# Altium PCB TermoCoupleNode.PcbDoc (part 1 of 2)
Units mm, origin at the board's own origin, x right, y up, seen from the top; angles counter-clockwise.
Board outline 65 x 65 mm, 4 copper layers (Top Layer 1, GND, 3V3, Bottom Layer 1), stack 0.408 mm thick; 64 components, 46 nets, 247 pads, 276 vias.
Unrouted connection lines stored in the file: 64.
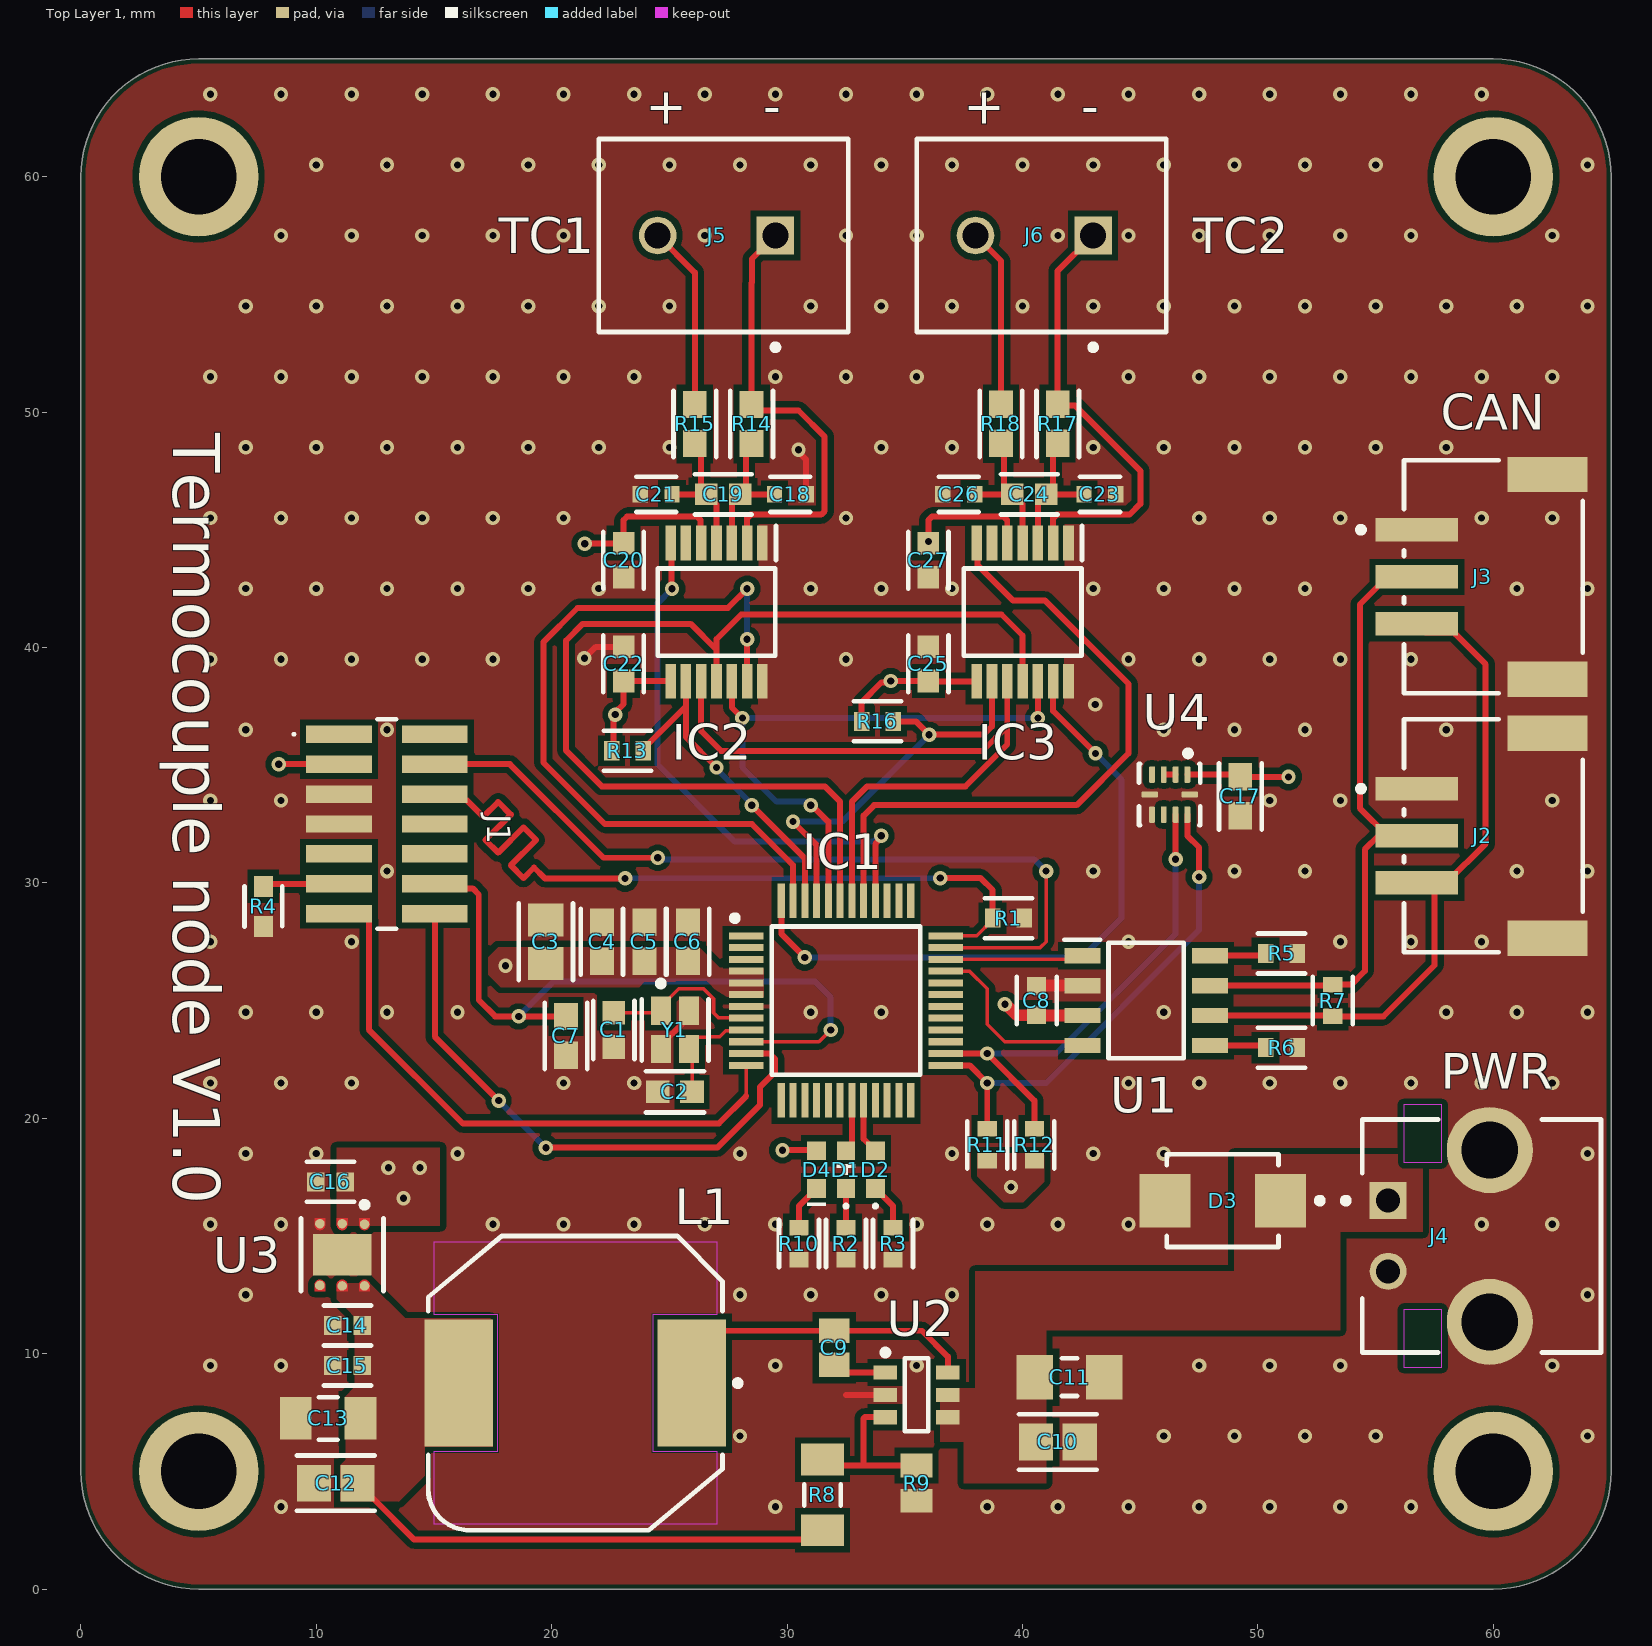
[diagram p0: Top Layer 1 view]
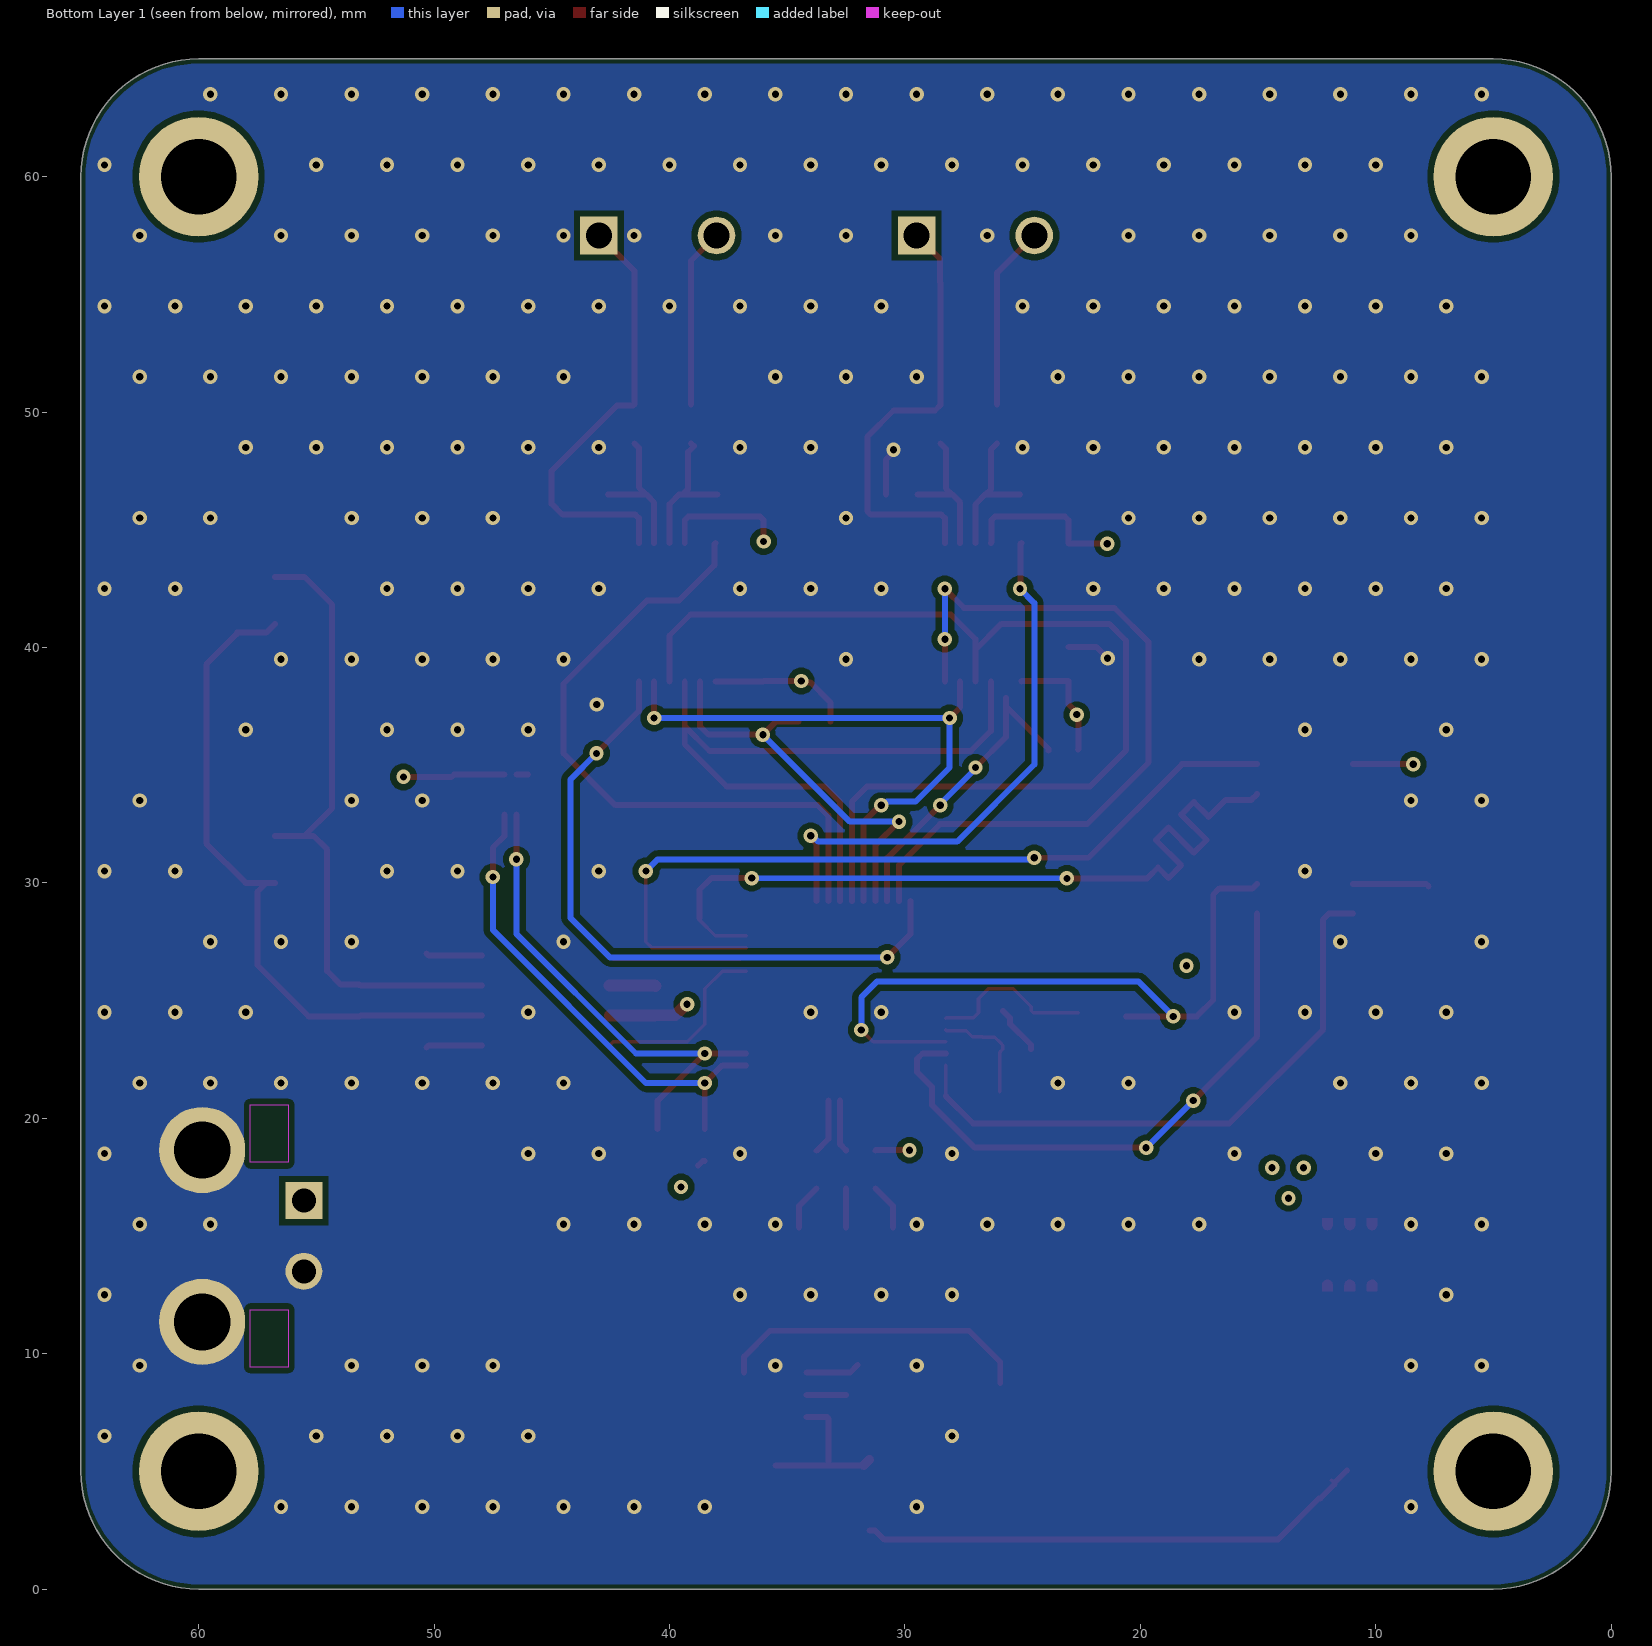
[diagram p1: Bottom Layer 1 view, seen from below]
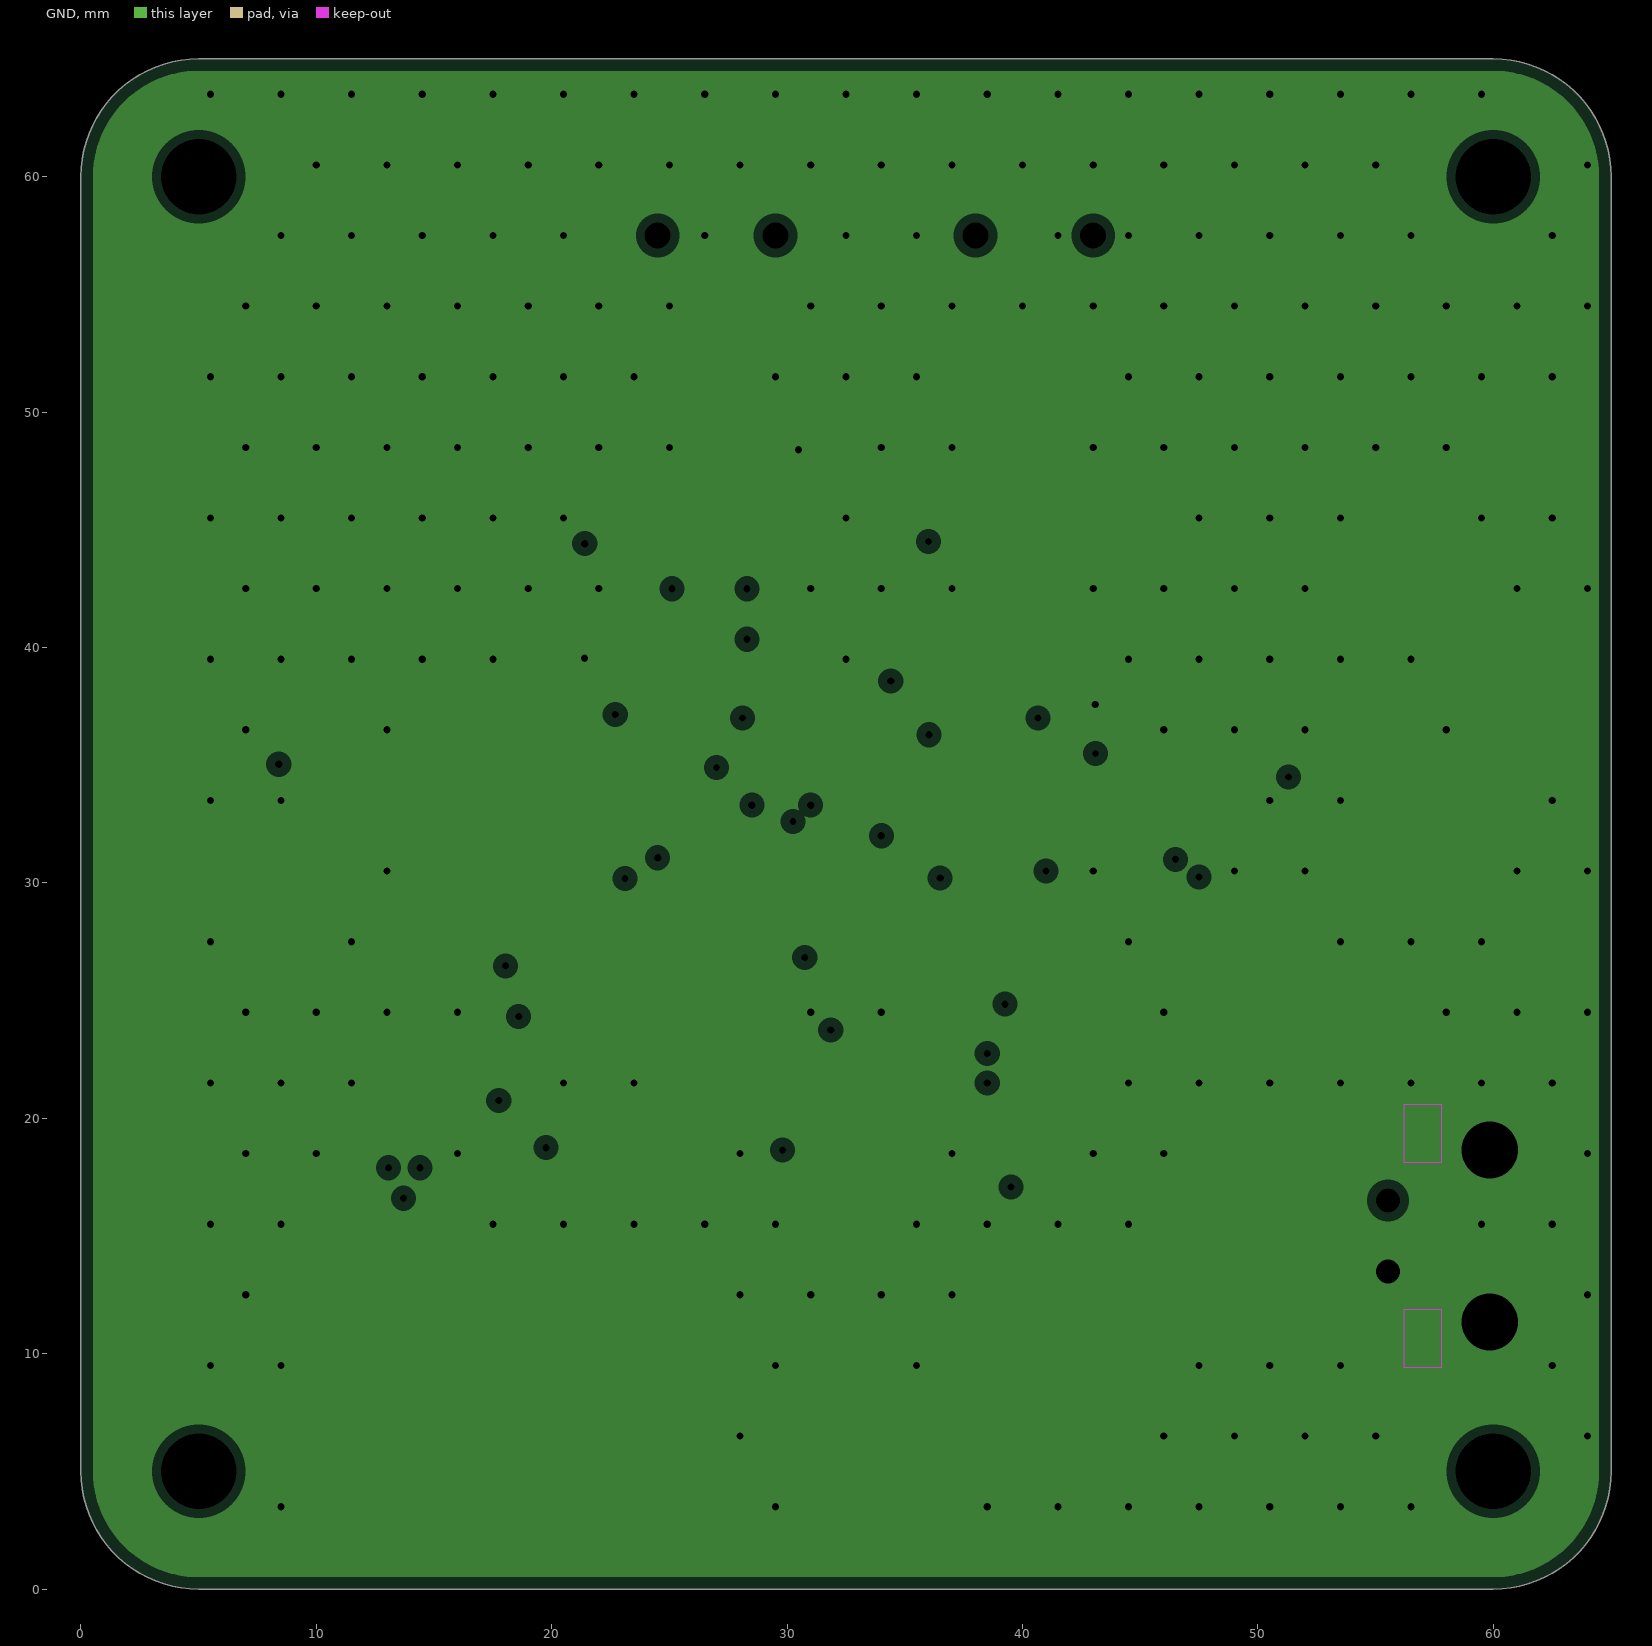
[diagram p2: GND, clearances drawn from the general rule]
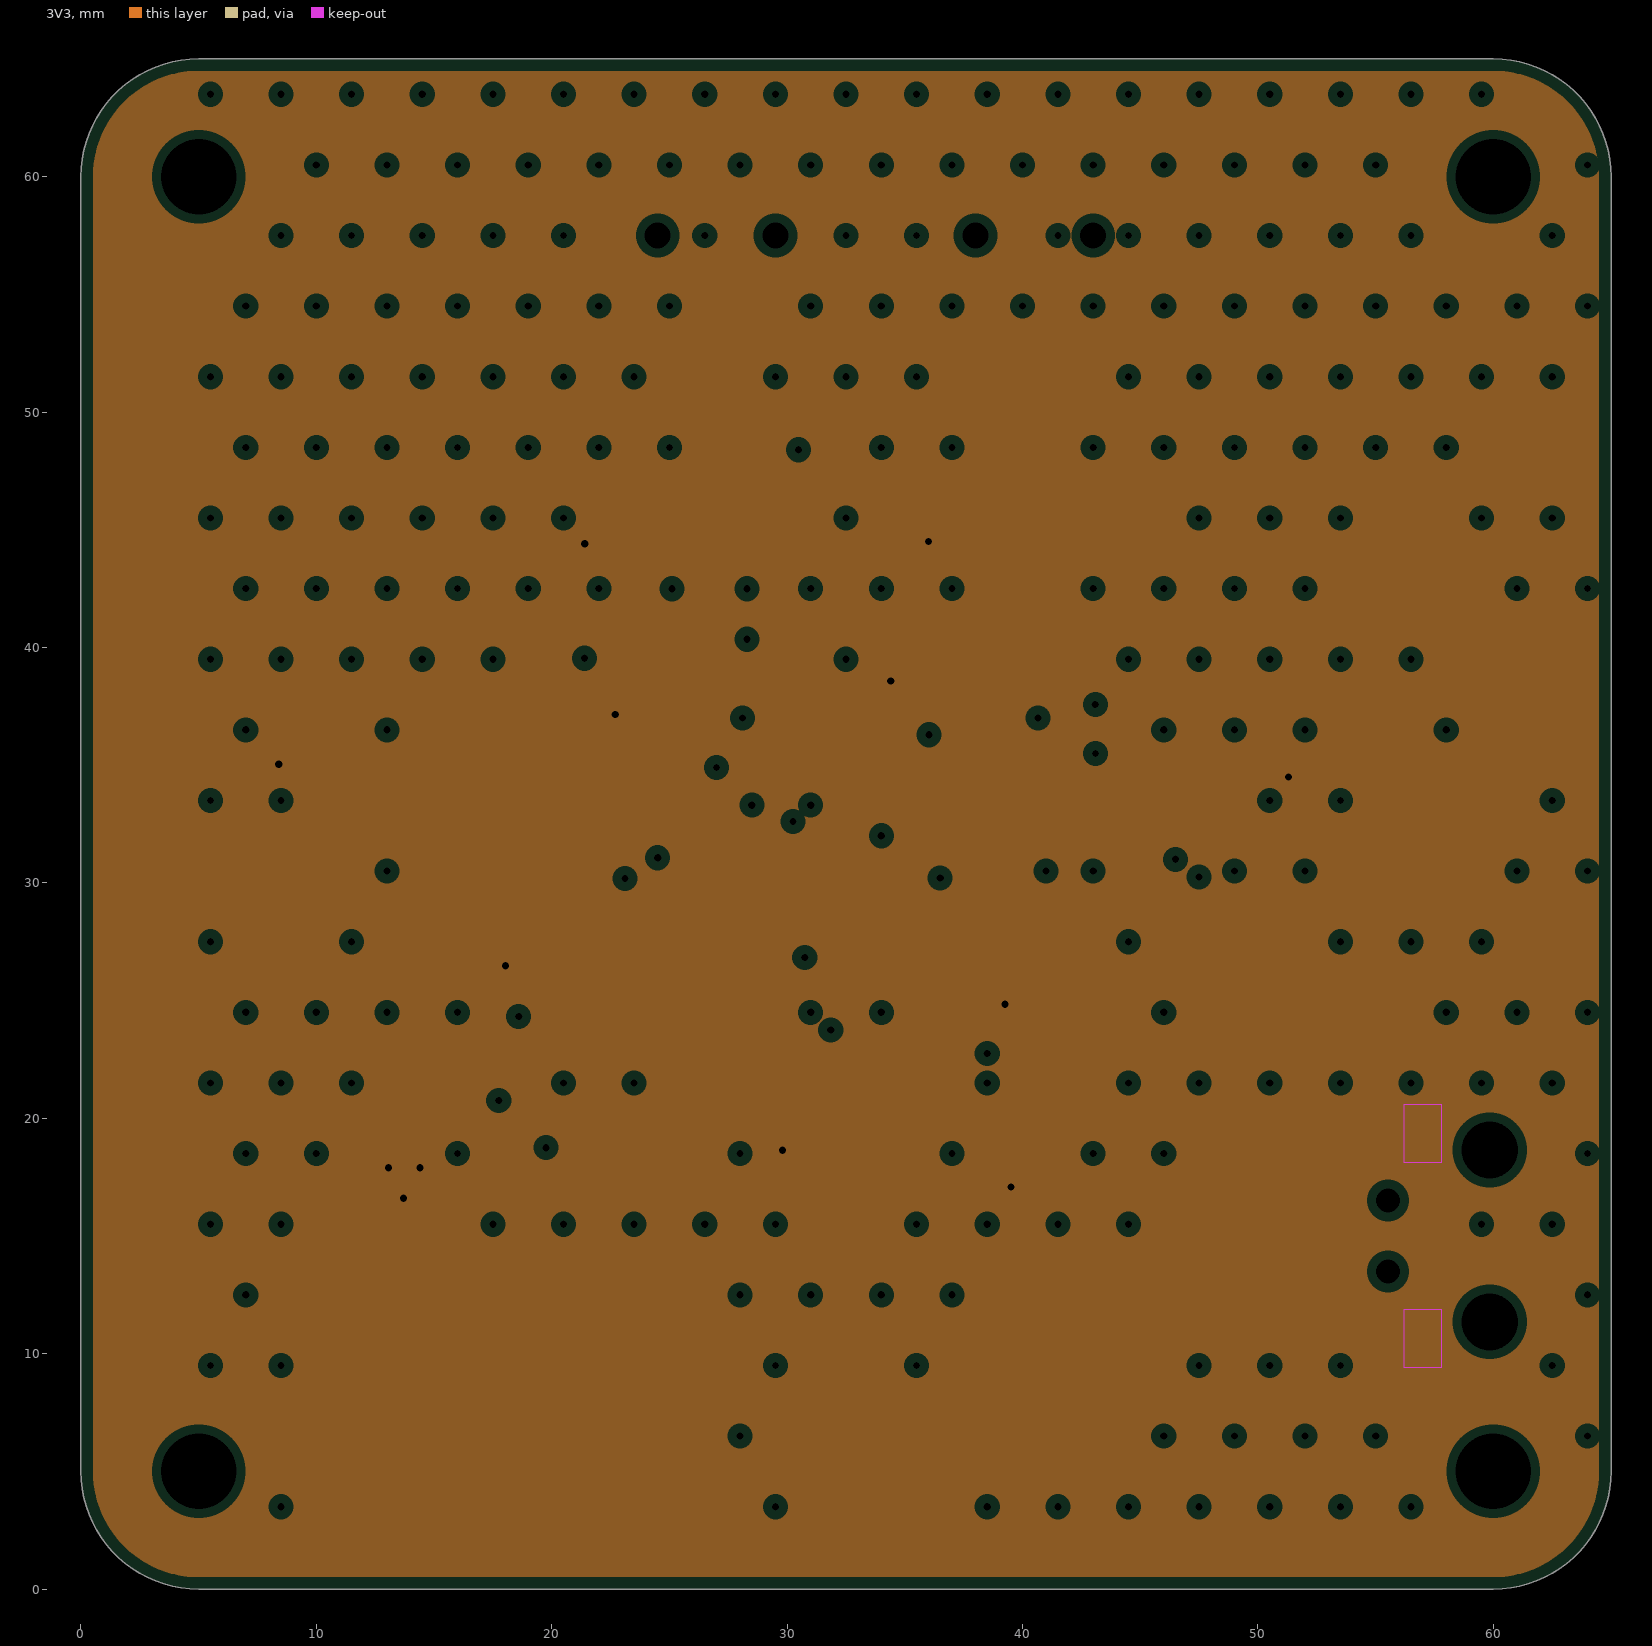
[diagram p3: 3V3, clearances drawn from the general rule]
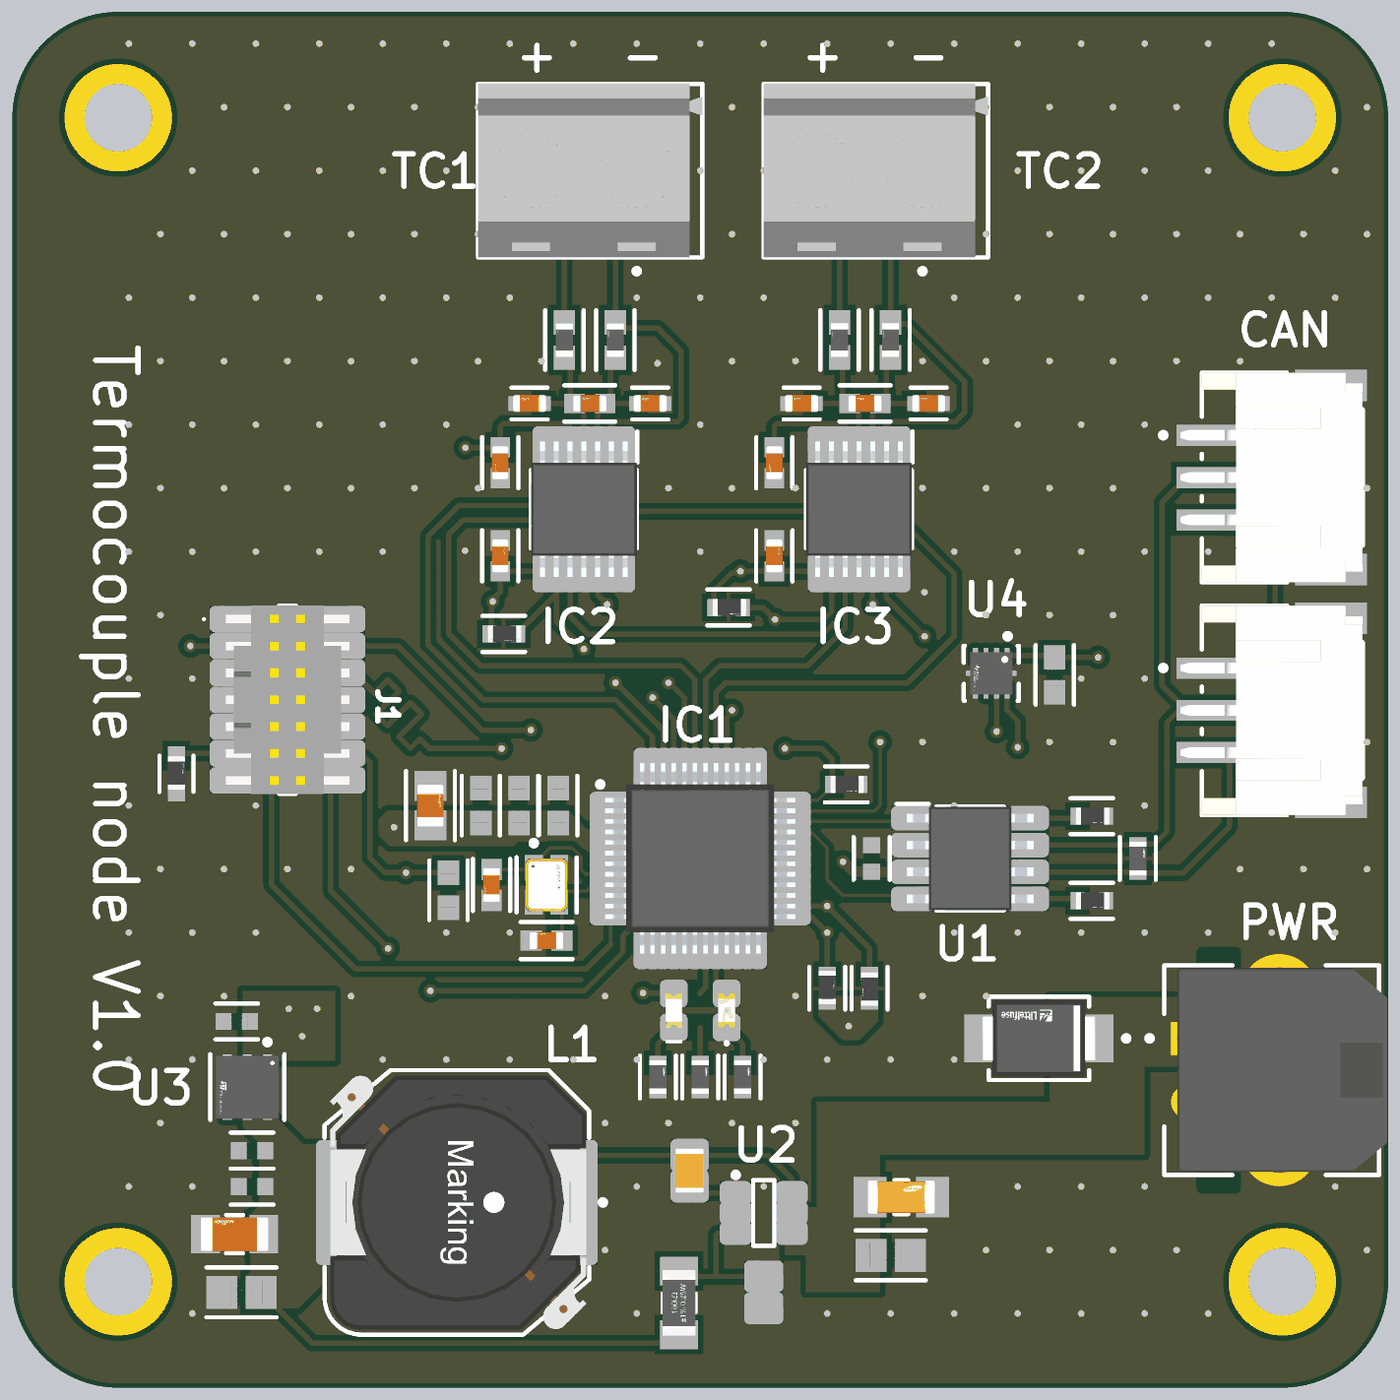
[diagram p4: 3D render of the assembled board from above, using the file's embedded part models]

## Layer stack, top to bottom
Top Solder: solder mask 0.0102, Solder Resist, Dk 3.5
Top Layer 1: signal copper 0.035
Dielectric 2: prepreg 0.0994, PP-006, Dk 4.1
GND: plane copper 0.0152, net GND
Dielectric 1: core 0.1088, FR-4, Dk 4.8
3V3: plane copper 0.0152, net 3V3
Dielectric 3: prepreg 0.0994, PP-006, Dk 4.1
Bottom Layer 1: signal copper 0.035
Bottom Solder: solder mask 0.0102, Solder Resist, Dk 3.5

## Board outline
0,5 ccw(c5,5) 5,0 60,0 ccw(c60,5) 65,5 65,60 ccw(c60,60) 60,65 5,65 ccw(c5,60) 0,60

## Design rules (kind name [scope] priority, off if disabled: settings)
BoardOutlineClearance [All] p1: gap=0.2 ignorepadtopadclearanceinfootprint=FALSE
Clearance "Stitching GND" [IsStitchingVia and InNet('GND') vs (IsVia and (Not IsStitchingVia)) Or IsPad] p1: gap=0.127 ignorepadtopadclearanceinfootprint=FALSE
Clearance [All] p2: gap=0.254 ignorepadtopadclearanceinfootprint=TRUE except(0.1: Arc-Arc Arc-Track Arc-SMDPad Track-Track Track-SMDPad; 0.15: Arc-Text Track-Text SMDPad-SMDPad SMDPad-Fill SMDPad-Poly SMDPad-Region SMDPad-Text THPad-Text Via-Text; 0.2: Arc-Via Track-Via; 0.35: Arc-THPad Track-THPad)
ComponentClearance ComponentClearance_1 [InComponent('L1','L2','L3','C24','C25','C26','C27') vs InComponent('L1','L2','L3','C24','C25','C26','C27')] p1 off: gap=0 collisioncheckmode=3 verticalgap=0 showdistances=FALSE
ComponentClearance [All] p2: gap=0 collisioncheckmode=3 verticalgap=0 showdistances=FALSE
DiffPairsRouting [All] p1: maxlimit=0.254 minlimit=0.254 mostfreqgap=0.254 toplayer_minwidth=0.254 toplayer_maxwidth=0.254 toplayer_prefwidth=0.254 bottomlayer_minwidth=0.254 bottomlayer_maxwidth=0.254 bottomlayer_prefwidth=0.254 maxuncoupledlength=12.7
HoleSize [All] p1: absolutevalues=TRUE maxlimit=7.62 minlimit=0.2 maxpercent=80.000 minpercent=20.000
MinimumAnnularRing [All] p1: minimumring=0.1
MinimumSolderMaskSliver [All] p1: minsoldermaskwidth=0.1
PasteMaskExpansion PasteMaskExpansion_1 [InPadClass('All Pads')] p1: expansion=0
PasteMaskExpansion [All] p2: expansion=0.254
PlaneClearance [All] p1: clearance=0.381
PlaneConnect [All] p1: pad.planeconnectstyle=Relief pad.reliefexpansion=0.508 pad.reliefentries=4 pad.reliefconductorwidth=0.254 pad.reliefairgap=0.254 via.planeconnectstyle=Direct via.reliefexpansion=0.508 via.reliefentries=4 via.reliefconductorwidth=0.254 via.reliefairgap=0.254
PolygonConnect [All] p1: connectstyle=Direct reliefconductorwidth=0.254 reliefentries=4 polygonreliefangle="90 Angle" airgapwidth=0.254
RoutingVias [All] p1: holewidth=0.305 width=0.61 viastyle="Through Hole" minholewidth=0.15 minwidth=0.25 maxholewidth=25.4 maxwidth=25.4
SMDNeckDown [All] p1 off: percent=100.000
SilkToSilkClearance [All] p1 off: silktosilkclearance=0.254
SilkToSolderMaskClearance SilkscreenOverComponentPads [IsPad] p1: minsilkscreentomaskgap=0.15 clearancetoexposedcopper=TRUE
SolderMaskExpansion [InPadClass('All Pads')] p1: expansion=0 istentingtop=FALSE useseparateexpansions=TRUE expansionbottom=0 istentingbottom=FALSE
SolderMaskExpansion SolderMaskExpansion_1 [All] p2: expansion=0.025 istentingtop=TRUE useseparateexpansions=TRUE expansionbottom=0.025 istentingbottom=TRUE
UnRoutedNet [All] p1: checkbadconnections=TRUE
Width [All] p1: maxlimit=1.27 minlimit=0.127 preferedwidth=0.254
20 further rules are at their usual default settings.

## Classes and differential pairs
component class "Local PCB temperature sensor": C17 R11 R12 U4
component class Designator: C18 C19 C20 C21 C22 C23 C24 C25 C26 C27 IC2 IC3 J5 J6 R R13 R14 R15 R16 R17 R18
component class Powersupply: C9 C10 C11 C12 C13 C14 C15 C16 D3 D4 J4 L1 R8 R9 R10 U2 U3
component class CAN_Tranceiver: C8 J2 J3 R5 R6 R7 U1
component class Toplevel: C1 C2 C3 C4 C5 C6 C7 D1 D2 IC1 J1 R1 R2 R3 R4 Y1

## Components (designator, comment, footprint, x,y, rotation, side; value= is the part's Value field where it differs from the comment)
C1 "4pF" FP-GQM187-0_15-IPC_B 22.637,23.75 r270 top
C2 "4pF" FP-GQM187-0_15-IPC_B 25.236,21.122 r180 top
C3 "4.7uF" FP-GCM21B-0_15-IPC_A 19.75,27.5 r90 top
C4 "100nF" FP-CL10-IPC_A 22.137,27.5 r90 top
C5 "100nF" FP-CL10-IPC_A 23.937,27.5 r90 top
C6 "100nF" FP-CL10-IPC_A 25.787,27.5 r90 top
C7 "100nF" FP-CL10-IPC_A 20.604,23.5 r270 top
C8 "1uF" FP-CL10-IPC_C 40.6,25 r90 top
C9 "Capacitor 100 nF +/-10% 50 V 0805" CAPC2013X95X50LL10T25 32,10.25 r270 top value=100nF
C10 "CL21B474KBFNNNF" FP-CL21-IPC_A 41.5,6.25 r0 top value=470nF
C11 "CL31B106KBHNNNE" FP-CL31B106KBHNNNE-IPC_A 42,9 r0 top value=10µF
C12 "CL21B474KBFNNNF" FP-CL21-IPC_A 10.824,4.5 r180 top value=470nF
C13 "GRM31CR61A476KE15K" FP-GRM31C-0_2-e0_3_0_8-IPC_B 10.5,7.25 r180 top value=47µF
C14 "100nF" FP-CL10-IPC_C 11.324,11.2 r180 top
C15 "10uF" FP-CL10-IPC_C 11.324,9.494 r180 top
C16 "10uF" FP-CL10-IPC_C 10.6,17.3 r180 top
C17 "100nF" FP-CL10-IPC_A 49.25,33.675 r270 top
C18 "10nF" FP-GCM188-0_1-MFG 30.135,46.5 r180 top
C19 "100nF" FP-GCM188-0_1-IPC_B 27.285,46.5 r180 top
C20 "100nF" FP-GCM188-0_1-IPC_B 23.05,43.7 r270 top
C21 "10nF" FP-GCM188-0_1-MFG 24.435,46.5 r180 top
C22 "100nF" FP-GCM188-0_1-IPC_B 23.05,39.3 r90 top
C23 "10nF" FP-GCM188-0_1-MFG 43.288,46.5 r180 top
C24 "100nF" FP-GCM188-0_1-IPC_B 40.288,46.5 r180 top
C25 "100nF" FP-GCM188-0_1-IPC_B 36,39.3 r90 top
C26 "10nF" FP-GCM188-0_1-MFG 37.288,46.5 r180 top
C27 "100nF" FP-GCM188-0_1-IPC_B 36,43.7 r270 top
D1 "150060GS55040" WL-SMCD_0603 -1237.5,1287.82 r90 top
D2 "150060YS75020" WL-SMCW_0603_150060xx75020 33.75,17.82 r90 top
D3 "SMBJ33A" FP-SMBJ-MFG 48.5,16.5 r180 top
D4 "150060RS75000" WL-SMCW_0603_150060xx75000 31.25,17.82 r90 top
IC1 "STM32G0B1CBT6" QFP50P900X900X160-48N 32.5,25 r0 top locked
IC2 "MAX31856MUD+" SOP65P640X110-14N 27,41.5 r270 top locked
IC3 "MAX31856MUD+" SOP65P640X110-14N 40,41.5 r270 top locked
J1 "FTSH-107-01-L-DV-K-TR" FTSH10701LDVKTR 13,32.5 r270 top
J2 "S3B-PH-SM4-TB(LF)(SN)" FP-S3B-PH-SM4-TB_LF_SN-MFG 60,32 r270 top locked
J3 "S3B-PH-SM4-TB(LF)(SN)" FP-S3B-PH-SM4-TB_LF_SN-MFG 60,43 r270 top locked
J4 "43650-0205" FP-43650-0205-MFG 59.5,15 r90 top locked
J5 "282836-2" TECO-282836-2_V 27,57.5 r180 top
J6 "282836-2" TECO-282836-2_V 40.5,57.5 r180 top
L1 "7447706330" WE-PD_1260P 21,8.75 r270 top value=33uH
R1 "10k" FP-RT0603-IPC_C 39.4,28.5 r0 top value=10KΩ
R2 "220 0603" FP-AF0603-IPC_C 32.5,14.677 r90 top
R3 "220 0603" FP-AF0603-IPC_C 34.5,14.677 r90 top
R4 "100" FP-RT0603-MFG 7.75,29 r90 top value=100Ω
R5 "10k" FP-RT0603-IPC_C 51,27 r0 top value=10KΩ
R6 "10k" FP-RT0603-IPC_C 51,23 r0 top value=10KΩ
R7 "120" FP-AF0603-IPC_C 53.175,25 r90 top
R8 "CRGCQ1206F100K" FP-CRGCQ1206-IPC_A 31.5,4 r90 top value=100k
R9 "ERA-6AEB1872V" RESC2013X60X40LL20T25 35.5,4.5 r270 top value=18.7k
R10 "220 0603" FP-AF0603-IPC_C 30.5,14.677 r90 top
R11 "10k" FP-RT0603-IPC_C 38.5,18.87 r90 top value=10KΩ
R12 "10k" FP-RT0603-IPC_C 40.5,18.87 r270 top value=10KΩ
R13 "10k" FP-RT0603-IPC_C 23.218,35.611 r0 top value=10KΩ
R14 "100" FP-CR0603-IPC_A 28.491,49.494 r90 top
R15 "100" FP-CR0603-IPC_A 26.079,49.494 r90 top
R16 "10k" FP-RT0603-IPC_C 33.838,36.86 r0 top value=10KΩ
R17 "100" FP-CR0603-IPC_A 41.494,49.5 r90 top
R18 "100" FP-CR0603-IPC_A 39.082,49.5 r90 top
U1 "TCAN3414DR" SOIC127P600X175-8N 45.25,25 r0 top locked
U2 "LMR51610XDBVR" SOT95P280X145-6N 35.5,8.25 r0 top
U3 "LD39200PU33R" FP-DFN6-7946637-MFG 11.1,14.2 r270 top
U4 "TMP461AIRUNR-S" FP-RUN0010A-MFG 46.25,33.75 r270 top
Y1 "ABM10W-50.0000MHZ-4-B1U-T3" FP-ABM10W-MFG 25.236,23.75 r270 top

## Footprints (in the part's own frame and the unit in brackets; to place one, negate y for a bottom-side part, rotate by r counter-clockwise, add the part's x,y. Pads: shape width x height; smd on the part's side, far side on the other; paste and mask are expansions set on the pad)
CAPC2013X95X50LL10T25 [mm] "Chip Capacitor, 2-Leads, Body 2.10x1.35mm, IPC High Density"
  rect 1.05x1.3 smd: 1(-0.725,0) 2(0.725,0)
  body extent -1.05,-0.67 1.05,0.67, height 0.95
FP-43650-0205-MFG [mm]
  rect 1.57x1.57 hole 1.02 paste-2539.97 mask+0: 1(1.5,3.97)
  round 1.57 hole 1.02 paste-2539.97 mask+0: 2(-1.5,3.97)
  round 3.66 hole 2.41 paste-2539.97 mask+0: 3(-3.65,-0.35) 4(3.65,-0.35)
  Keep-Out Layer region: 3.125,1.7 5.575,1.7 5.575,3.3 3.125,3.3
  Keep-Out Layer region: -5.575,1.7 -3.125,1.7 -3.125,3.3 -5.575,3.3
  silkscreen extent -4.95,-5.08 4.95,5.89, body extent -4.82,-5.45 4.83,4.45, height 6.07
FP-ABM10W-MFG [mm]
  rect 1.2x0.85 smd paste+0 mask+0: 1(-0.812,-0.6) 2(0.812,-0.6) 3(0.812,0.6) 4(-0.812,0.6)
  silkscreen extent -2.1,-1.42 1.3,1.42, body extent -1.51,-1.15 1.51,1.15, height 0.25
FP-AF0603-IPC_C [mm]
  rect 0.659x0.812 smd paste+0 mask+0: 1(-0.677,0) 2(0.677,0)
  silkscreen extent -1.01,-0.85 1.01,0.85, body extent -1.11,-0.55 1.11,0.55, height 0.25
FP-CL10-IPC_A [mm]
  rect 1.158x1.012 smd paste+0 mask+0: 1(-0.827,0) 2(0.827,0)
  silkscreen extent -1.41,-0.91 1.41,0.91, body extent -1.91,-1.01 1.91,1.01, height 0.25
FP-CL10-IPC_C [mm]
  rect 0.758x0.812 smd paste+0 mask+0: 1(-0.627,0) 2(0.627,0)
  silkscreen extent -1.01,-0.85 1.01,0.85, body extent -1.11,-0.55 1.11,0.55, height 0.25
FP-CL21-IPC_A [mm]
  rect 1.455x1.556 smd paste+0 mask+0: 1(-0.926,0) 2(0.926,0)
  silkscreen extent -1.65,-1.18 1.65,1.18, body extent -2.15,-1.28 2.15,1.28, height 0.25
FP-CL31B106KBHNNNE-IPC_A [mm]
  rect 1.554x1.906 smd paste+0 mask+0: 1(-1.476,0) 2(1.476,0)
  silkscreen extent -0.32,-0.8 0.32,0.8, body extent -2.75,-1.45 2.75,1.45, height 0.25
FP-CR0603-IPC_A [mm]
  rect 1.158x1.012 smd paste+0 mask+0: 1(-0.827,0) 2(0.827,0)
  silkscreen extent -1.41,-0.91 1.41,0.91, body extent -1.91,-1.01 1.91,1.01, height 0.25
FP-CRGCQ1206-IPC_A [mm]
  rect 1.356x1.81 smd paste+0 mask+0: 1(-1.501,0) 2(1.501,0)
  silkscreen extent -0.45,-0.77 0.45,0.78, body extent -2.68,-1.4 2.68,1.4, height 0.25
FP-DFN6-7946637-MFG [mm]
  round 0.405 smd paste+0 mask+0: 1(-1.3,0.95) 2(-1.321,0) 3(-1.321,-0.95) 4(1.3,-0.95) 5(1.321,0) 6(1.321,0.95)
  rect 1.75x2.5 smd paste+0 mask+0: 7(0,0)
  Top Layer 1 region: -1.55,-0.725 -1.275,-0.725 -1.189,-0.742 -1.116,-0.791 -1.067,-0.864 -1.05,-0.95 -1.05,-0.95 -1.067,-1.036 -1.116,-1.109 -1.189,-1.158 -1.275,-1.175 -1.275,-1.175 -1.55,-1.175
  Top Layer 1 region: -1.55,1.175 -1.275,1.175 -1.189,1.158 -1.116,1.109 -1.067,1.036 -1.05,0.95 -1.05,0.95 -1.067,0.864 -1.116,0.791 -1.189,0.742 -1.275,0.725 -1.275,0.725 -1.55,0.725
  Top Layer 1 region: -1.55,0.225 -1.275,0.225 -1.189,0.208 -1.116,0.159 -1.067,0.086 -1.05,0 -1.05,0 -1.067,-0.086 -1.116,-0.159 -1.189,-0.208 -1.275,-0.225 -1.275,-0.225 -1.55,-0.225
  Top Layer 1 region: 1.55,-1.175 1.275,-1.175 1.189,-1.158 1.116,-1.109 1.067,-1.036 1.05,-0.95 1.05,-0.95 1.067,-0.864 1.116,-0.791 1.189,-0.742 1.275,-0.725 1.275,-0.725 1.55,-0.725
  Top Layer 1 region: 1.55,-0.225 1.275,-0.225 1.189,-0.208 1.116,-0.159 1.067,-0.086 1.05,0 1.05,0 1.067,0.086 1.116,0.159 1.189,0.208 1.275,0.225 1.275,0.225 1.55,0.225
  Top Layer 1 region: 1.55,0.725 1.275,0.725 1.189,0.742 1.116,0.791 1.067,0.864 1.05,0.95 1.05,0.95 1.067,1.036 1.116,1.109 1.189,1.158 1.275,1.175 1.275,1.175 1.55,1.175
  silkscreen extent -2.25,-1.75 1.55,1.75, body extent -1.65,-1.65 1.65,1.65, height 0.25
FP-GCM21B-0_15-IPC_A [mm]
  rect 1.406x1.508 smd paste+0 mask+0: 1(-0.926,0) 2(0.926,0)
  silkscreen extent -1.63,-1.15 1.63,1.15, body extent -2.13,-1.25 2.13,1.25, height 0.25
FP-GCM188-0_1-IPC_B [mm]
  rect 0.959x0.912 smd paste+0 mask+0: 1(-0.727,0) 2(0.727,0)
  silkscreen extent -1.21,-0.86 1.21,0.86, body extent -1.46,-0.71 1.46,0.71, height 0.25
FP-GCM188-0_1-MFG [mm]
  rect 0.65x0.7 smd paste+0 mask+0: 1(-0.675,0) 2(0.675,0)
  silkscreen extent -0.85,-0.75 0.85,0.75, body extent -1.1,-0.55 1.1,0.55, height 0.25
FP-GQM187-0_15-IPC_B [mm]
  rect 1.007x0.958 smd paste+0 mask+0: 1(-0.726,0) 2(0.726,0)
  silkscreen extent -1.23,-0.88 1.23,0.88, body extent -1.48,-0.73 1.48,0.73, height 0.25
FP-GRM31C-0_2-e0_3_0_8-IPC_B [mm]
  rect 1.355x1.806 smd paste+0 mask+0: 1(-1.376,0) 2(1.376,0)
  silkscreen extent -0.4,-0.9 0.4,0.9, body extent -2.3,-1.15 2.3,1.15, height 0.25
FP-RT0603-IPC_C [mm]
  rect 0.659x0.812 smd paste+0 mask+0: 1(-0.677,0) 2(0.677,0)
  silkscreen extent -1.01,-0.85 1.01,0.85, body extent -1.11,-0.55 1.11,0.55, height 0.25
FP-RT0603-MFG [mm]
  rect 0.9x0.8 smd paste+0 mask+0: 1(-0.85,0) 2(0.85,0)
  silkscreen extent -0.85,-0.81 0.86,0.8, body extent -1.4,-0.55 1.4,0.55, height 0.25
FP-RUN0010A-MFG [mm]
  rrect40% 0.7x0.25 smd paste+0 mask+0: 1(-0.85,0.75) 2(-0.85,0.25) 3(-0.85,-0.25) 4(-0.85,-0.75) 6(0.85,-0.75) 7(0.85,-0.25) 8(0.85,0.25) 9(0.85,0.75)
  rrect40% 0.25x0.7 smd paste+0 mask+0: 5(0,-0.85) 10(0,0.85)
  silkscreen extent -1.87,-1.3 1.3,1.3, body extent -1.3,-1.3 1.3,1.3, height 0.25
FP-S3B-PH-SM4-TB_LF_SN-MFG [mm]
  rect 1x3.5 smd paste+0 mask+0: 1(-2,-3.25) 2(0,-3.25) 3(2,-3.25)
  rect 1.5x3.4 smd paste+0 mask+0: 4(-4.35,2.3) 5(4.35,2.3)
  silkscreen extent -4.95,-5.75 4.95,3.8, body extent -5.2,-5.1 5.2,4.1, height 0.25
FP-SMBJ-MFG [mm]
  rect 2.16x2.26 smd paste+0 mask+0: 1(-2.45,0) 2(2.45,0)
  silkscreen extent -4.25,-1.97 2.38,1.97, body extent -3.63,-2.07 3.63,2.07, height 0.25
FTSH10701LDVKTR [mm]
  rect 0.74x2.79 smd: 1(-3.81,-2.035) 2(-3.81,2.035) 3(-2.54,-2.035) 4(-2.54,2.035) 5(-1.27,-2.035) 6(-1.27,2.035) 7(0,-2.035) 8(0,2.035) 9(1.27,-2.035) 10(1.27,2.035) 11(2.54,-2.035) 12(2.54,2.035) 13(3.81,-2.035) 14(3.81,2.035)
  silkscreen extent -4.44,-4 4.45,0.4, body extent -4.45,-2.92 4.45,2.92, height 6.12
QFP50P900X900X160-48N [mm]
  rect 1.475x0.3 smd: 1(-4.238,2.75) 2(-4.238,2.25) 3(-4.238,1.75) 4(-4.238,1.25) 5(-4.238,0.75) 6(-4.238,0.25) 7(-4.238,-0.25) 8(-4.238,-0.75) 9(-4.238,-1.25) 10(-4.238,-1.75) 11(-4.238,-2.25) 12(-4.238,-2.75) 25(4.238,-2.75) 26(4.238,-2.25) 27(4.238,-1.75) 28(4.238,-1.25) 29(4.238,-0.75) 30(4.238,-0.25) 31(4.238,0.25) 32(4.238,0.75) 33(4.238,1.25) 34(4.238,1.75) 35(4.238,2.25) 36(4.238,2.75)
  rect 0.3x1.475 smd: 13(-2.75,-4.238) 14(-2.25,-4.238) 15(-1.75,-4.238) 16(-1.25,-4.238) 17(-0.75,-4.238) 18(-0.25,-4.238) 19(0.25,-4.238) 20(0.75,-4.238) 21(1.25,-4.238) 22(1.75,-4.238) 23(2.25,-4.238) 24(2.75,-4.238) 37(2.75,4.238) 38(2.25,4.238) 39(1.75,4.238) 40(1.25,4.238) 41(0.75,4.238) 42(0.25,4.238) 43(-0.25,4.238) 44(-0.75,4.238) 45(-1.25,4.238) 46(-1.75,4.238) 47(-2.25,4.238) 48(-2.75,4.238)
  silkscreen extent -4.85,-3.15 3.15,3.62, body extent -4.5,-4.5 4.5,4.5, height 1.6
RESC2013X60X40LL20T25 [mm] "Chip Resistor, 2-Leads, Body 2.00x1.25mm, IPC High Density"
  rect 1x1.35 smd: 1(-0.75,0) 2(0.75,0)
  body extent -1.1,-0.72 1.1,0.72, height 0.6
SOIC127P600X175-8N [mm]
  rect 1.525x0.65 smd: 1(-2.712,1.905) 2(-2.712,0.635) 3(-2.712,-0.635) 4(-2.712,-1.905) 5(2.712,-1.905) 6(2.712,-0.635) 7(2.712,0.635) 8(2.712,1.905)
  silkscreen extent -3.47,-2.45 1.6,2.58, body extent -3,-2.45 3,2.45, height 1.75
SOP65P640X110-14N [mm]
  rect 1.475x0.45 smd: 1(-2.938,1.95) 2(-2.938,1.3) 3(-2.938,0.65) 4(-2.938,0) 5(-2.938,-0.65) 6(-2.938,-1.3) 7(-2.938,-1.95) 8(2.938,-1.95) 9(2.938,-1.3) 10(2.938,-0.65) 11(2.938,0) 12(2.938,0.65) 13(2.938,1.3) 14(2.938,1.95)
  silkscreen extent -3.67,-2.5 1.85,2.52, body extent -3.2,-2.5 3.2,2.5, height 1.1
SOT95P280X145-6N [mm] "SOT23, 6-Leads, Body 2,90x2,80mm, Pitch 0,95mm, IPC Medium Density"
  rect 1x0.6 smd: 1(-1.325,0.95) 2(-1.325,0) 3(-1.325,-0.95) 4(1.325,-0.95) 5(1.325,0) 6(1.325,0.95)
  silkscreen extent -1.45,-1.55 0.5,1.92, body extent -0.88,-1.52 0.87,1.53, height 1.45
TECO-282836-2_V [mm] "Female Header, Pitch 5mm, 1 x 2 Position, Height 10mm"
  rect 1.6x1.6 hole 1.1: 1(-2.5,0)
  round 1.6 hole 1.1: 2(2.5,0)
  silkscreen extent -5.6,-4.1 5,4.87, body extent -5.6,-4.1 5,4.1, height 10
WE-PD_1260P [mm] "SMT Shielded Power Inductor, 2-leads, body 12x12mm"
  rect 5.4x2.9 smd: 1(0,4.95) 2(0,-4.95)
  Top Layer 1 keep-out region: -6,6 -2.9,6 -2.9,3.3 2.9,3.3 2.9,6 6,6 6,-6 2.9,-6 2.9,-3.3 -2.9,-3.3 -2.9,-6 -6,-6
  silkscreen extent -6.25,-6.25 6.25,7.03, body extent -5.99,-6.01 6.01,6.14, height 5.75
WL-SMCD_0603 [mm] "SMD Mono-color Chip LED, body 1.6x0.8mm"
  rect 0.8x0.75 smd: 1(-1270.8,-1270) 2(-1269.2,-1270)
  silkscreen extent -1271.62,-1270.4 -1269.78,-1269.6, body extent -1270.8,-1270.4 -1269.2,-1269.6, height 0.42
WL-SMCW_0603_150060xx75000 [mm] "SMD Mono-color Chip LED, body 1.60 x 0.80 mm"
  rect 0.8x0.8 smd: 1(-0.8,0) 2(0.8,0)
  silkscreen extent -1.55,-0.4 -1.4,0.4, body extent -0.8,-0.4 0.8,0.4, height 0.7
WL-SMCW_0603_150060xx75020 [mm] "SMD Mono-color Chip LED, body 1.6x0.8mm"
  rect 0.8x0.8 smd: 1(-0.8,0) 2(0.8,0)
  silkscreen extent -1.62,-0.08 -1.48,0.07, body extent -0.8,-0.4 0.8,0.4, height 0.25

## Part data
C1 C2: library part CMP-06035-061124-1, "GQM1875C2E4R0BB12D / Ceramic Capacitor 4pF ±0.1pF 250VDC C0G 0603 Paper T/R", Case Code (Imperial)=0603, Case Code (Metric)=1608, Dielectric=C0G, Max Operating Temperature=125°C, Min Operating Temperature=-55°C, Package Quantity=4000, Voltage Rating=250V, Capacitance=4pF, Case/Package=0603, Construction=Flat, Depth=0.8mm, Height=0.7mm, Length=1.6mm, Mount="Surface Mount", Packaging="Tape and Reel", Radiation Hardening=No, Series=GQM, Termination=SMD/SMT, Thickness=0.031inch, Voltage Rating (DC)=250V, Width=0.8mm
C3: library part CMP-2007-03343-2, "Ceramic Capacitor for Automotive 4.7uF ±10% 16VDC X7R 0805 Embossed T/R", Case Code (Imperial)=0805, Case Code (Metric)=2012, Dielectric=X7R, Max Operating Temperature=125°C, Min Operating Temperature=-55°C, Package Quantity=1, Ratings=AEC-Q200, Tolerance=10%, Voltage=16V, Capacitance=4.7uF, Case/Package=0805, Depth=1.25mm, Height=1.25mm, Lead Free="Lead Free", Length=2mm, Mount="Surface Mount", Packaging="Tape and Reel", Radiation Hardening=No, REACH SVHC="No SVHC", Termination=SMD/SMT, Thickness=0.055inch, Voltage Rating=16V, Voltage Rating (DC)=16V, Weight=0.000335oz, Width=0.049inch
C4 C5 C6 C7 C17: library part CMP-13271-002683-1, "Cap Ceramic 100nF 16V X7R ±10% Pad SMD 0603 +125°C T/R", Case Code (Imperial)=0603, Case Code (Metric)=1608, Max Operating Temperature=125°C, Min Operating Temperature=-55°C, Ratings=AEC-Q200, Tolerance=10%, Voltage Rating=16V, Capacitance=100nF, Case/Package=0603, Features="Soft Termination", Length=0.063inch, Mount="Surface Mount", Packaging="Tape and Reel", Thickness=0.035inch, Width=0.031inch
C8: library part CMP-13271-000784-1, "Cap Ceramic 1uF 16V X7R ±10% Pad SMD 0603 +125°C T/R / CL10B105KO8NNNL", Case/Package=0603, Dielectric=X7R, Max Operating Temperature=125°C, Min Operating Temperature=-55°C, Package Quantity=15000, Tolerance=10%, Voltage Rating=16V, Capacitance=1uF, Depth=0.8mm, Height=0.8mm, Lead Free="Lead Free", Length=1.6mm, Mount="Surface Mount", Packaging="Tape and Reel", Radiation Hardening=No, Thickness=0.035inch, Voltage Rating (DC)=16V, Width=0.031inch
C9: library part CMP-001-00018-6, "Chip Capacitor, 100 nF, +/- 10%, 50 V, 0805 (2012 Metric)", Capacitor Type=Ceramic, Case/Package=0805, Max Operating Temperature=125°C, Min Operating Temperature=-55°C, Tolerance=10%, Voltage Rating=50V, Mounting Technology=SM, Pins=2, RoHS Compliant=True
C10 C12: library part CMP-001-00098-1, "Ceramic Capacitor, Multilayer, Ceramic, 50V, 10% +Tol, 10% -Tol, X7R, 15% TC, 0.47uF, Surface Mount, 0805", Capacitor Type=Ceramic, Case/Package=0805, Max Operating Temperature=125°C, Min Operating Temperature=-55°C, Package Shape=Rectangular, Package Style=SMTMeter, Rated DC Voltage (URdc)=50V, Temperature Characteristics Code=X7R, Tolerance  (fill in as +-)=10%, Dielectric Material=Ceramic, Height=1.25mm, JESD-609 Code=e3, Length=2mm, Mounting Technology="Surface Mount", Multilayer=Yes, Packaging="Tape and Reel", Pins=2, Reach SVHC Compliant=Yes, RoHS Compliant=Yes, Terminal Finish=Nickel, Termination=Wraparound, Tolerance (fill in as +-)=10%, Width=1.25mm
C11: library part CMP-001-00099-1, "Ceramic Capacitor, Multilayer, Ceramic, 50V, 10% +Tol, 10% -Tol, X7R, 15% TC, 10uF, Surface Mount, 1206", Capacitor Type=Ceramic, Case/Package=1206, Max Operating Temperature=125°C, Min Operating Temperature=-55°C, Package Shape=Rectangular, Package Style=SMTMeter, Rated DC Voltage (URdc)=50V, Temperature Characteristics Code=X7R, Tolerance  (fill in as +-)=10%, Dielectric Material=Ceramic, Height=1.8mm, JESD-609 Code=e3, Length=3.2mm, Mounting Technology="Surface Mount", Multilayer=Yes, Packaging="Tape and Reel", Pins=2, Reach SVHC Compliant=Yes, RoHS Compliant=Yes, Terminal Finish=Nickel, Termination=Wraparound, Tolerance (fill in as +-)=10%, Width=1.6mm
C13: library part CMP-001-00103-1, "Ceramic Capacitor, Multilayer, Ceramic, 10V, 10% +Tol, 10% -Tol, X5R, 15% TC, 47uF, Surface Mount, 1206", Capacitor Type=Ceramic, Case/Package=1206, Max Operating Temperature=85°C, Min Operating Temperature=-55°C, Package Shape=Rectangular, Package Style=SMTMeter, Rated DC Voltage (URdc)=10V, Temperature Characteristics Code=X5R, Tolerance  (fill in as +-)=10%, Dielectric Material=Ceramic, Height=1.6mm, JESD-609 Code=e3, Length=3.2mm, Mounting Technology="Surface Mount", Multilayer=Yes, Packaging="Tape and Reel", Pins=2, Reach SVHC Compliant=Yes, RoHS Compliant=Yes, Terminal Finish=Nickel, Termination=Wraparound, Tolerance (fill in as +-)=10%, Width=1.6mm
C14: library part CMP-13271-002683-1, "Cap Ceramic 100nF 16V X7R ±10% Pad SMD 0603 +125°C T/R / CL10B104KO8WPNC", Case Code (Imperial)=0603, Case Code (Metric)=1608, Max Operating Temperature=125°C, Min Operating Temperature=-55°C, Ratings=AEC-Q200, Tolerance=10%, Voltage Rating=16V, Capacitance=100nF, Case/Package=0603, Features="Soft Termination", Length=0.063inch, Mount="Surface Mount", Packaging="Tape and Reel", Thickness=0.035inch, Width=0.031inch
C15 C16: library part CMP-13271-003287-1, "Cap Ceramic 10uF 16V X6S ±20% Pad SMD 0603 +105°C T/R / CL10X106MO8NRNC", Case Code (Imperial)=0603, Case Code (Metric)=1608, Max Operating Temperature=105°C, Min Operating Temperature=-55°C, Tolerance=20%, Voltage Rating=16V, Capacitance=10uF, Case/Package=0603, Length=0.063inch, Mount="Surface Mount", Packaging="Tape and Reel", Thickness=0.035inch, Width=0.031inch
C18 C21 C23 C26: library part CMP-2006-02392-2, "Ceramic Capacitor for Automotive 10nF  ±10% 100VDC X7R 0603 Paper T/R", Case Code (Imperial)=0603, Case Code (Metric)=1608, Dielectric=X7R, Max Operating Temperature=125°C, Min Operating Temperature=-55°C, Package Quantity=1, Ratings=AEC-Q200, Tolerance=10%, Voltage=100V, Capacitance=10nF, Case/Package=0603, Depth=0.8mm, Height=0.8mm, Lead Free="Lead Free", Length=1.6mm, Mount="Surface Mount", Packaging="Tape and Reel", Radiation Hardening=No, REACH SVHC="No SVHC", Termination=SMD/SMT, Thickness=0.035inch, Voltage Rating=100V, Voltage Rating (DC)=100V, Width=0.8mm
C19 C20 C22 C24 C25 C27: library part CMP-2006-02353-3, "Ceramic Capacitor for Automotive 100nF  ±10% 50VDC X8L 0603 Paper T/R", Case Code (Imperial)=0603, Case Code (Metric)=1608, Dielectric=X8L, Max Operating Temperature=150°C, Min Operating Temperature=-55°C, Package Quantity=4000, Ratings=AEC-Q200, Tolerance=10%, Voltage=50V, Capacitance=100nF, Case/Package=0603, Depth=0.8mm, Height=0.8mm, Lead Free="Lead Free", Length=1.6mm, Mount="Surface Mount", Packaging="Tape and Reel", Radiation Hardening=No, Termination=SMD/SMT, Thickness=0.035inch, Voltage Rating=50V, Voltage Rating (DC)=50V, Width=0.5mm
D1: library part CMP-03913-90235563-2, "150060GS55040 WL-SMCD SMT Mono-color Chip LED Diffused", Forward Current=60mA, Forward Voltage=3.2V, Max Operating Temperature=85°C, Max Reverse Voltage (DC)=5V, Min Operating Temperature=-40°C, Dominant Wavelength=525nm, Height=400µm, Length=1.6mm, Luminous Intensity=430mcd, NexarPartId=90235563, Packaging="Tape and Reel", Peak Wavelength=520nm, RoHS=Compliant, Viewing Angle=140°, Wavelength=525nm, Width=800µm
D2: library part CMP-03913-104891429-2, "WL-SMCW SMT Mono-Color Chip LED Waterclear super f", Forward Current=60mA, Forward Voltage=2V, Max Operating Temperature=85°C, Max Reverse Voltage (DC)=5V, Min Operating Temperature=-40°C, Dominant Wavelength=590nm, Height=250µm, Length=1.6mm, Luminous Intensity=130mcd, Peak Wavelength=595nm, RoHS=Compliant, Viewing Angle=140°, Width=800µm
D3: library part CMP-2000-07095-2, "TVS DIODE 33V 53.3V DO214AA", Breakdown Voltage=36.7V, Clamping Voltage=53.3V, Manufacturer="Littelfuse Inc", Max Junction Temp=+150°C, Package=SMBJ, Peak Pulse Current=11.3A, Peak Pulse Power=600W, Reverse Standoff Voltage=33V, Temperature="-65°C to +150°C", Temperature Range Low=-65°C, Automotive=No, Category=Diode, ComponentLink2Description=Datasheet, ComponentLink2URL=https://www.littelfuse.com/~/media/electronics/datasheets/tvs_diodes/littelfuse_tvs_diode_smbj_datasheet.pdf.pdf, Device Class L1="Circuit Protection", Device Class L2="TVS Diodes", Device Class L3=unset, Digikey Description="TVS DIODE 33V 53.3V DO214AA", Direction=Unidirectional, Height=2.61mm, Lead Free=Yes, Manufacturer Part Number=SMBJ33A, Mouser Description="TVS DIODE 33V 53.3V DO214AA", Number of Channels=1, Octopart=https://octopart.com/smbj33a-littelfuse-350829, RoHS=TRUE, Temperature Range High=+150°C
D4: library part CMP-1426-00001-4, "LED Low-Power Uni-Color Red 630nm 2V 2-Pin Chip 0603(1608Metric) T/R", Case Code (Imperial)=0603, Case Code (Metric)=1608, Color=Red, Forward Current=100mA, Forward Voltage=2V, Max Junction Temperature (Tj)=95°C, Max Operating Temperature=85°C, Max Reverse Voltage (DC)=5V, Min Operating Temperature=-40°C, Power Dissipation=72mW, Test Current=20mA, Case/Package=0603, Dominant Wavelength=625nm, Height=700µm, Length=1.6mm, Lens Style="Clear, Rectangular", Luminous Intensity=250mcd, Mount="Surface Mount", Packaging="Tape and Reel", Peak Wavelength=630nm, REACH SVHC=Unknown, Reverse Voltage=5V, RoHS=Compliant, Viewing Angle=140°, Wavelength=625nm, Width=800µm
IC1: "Integrated Circuit", Manufacturer_Name=STMicroelectronics, Mouser Part Number=511-STM32G0B1CBT6, Arrow Part Number=STM32G0B1CBT6, Arrow Price/Stock=https://www.arrow.com/en/products/stm32g0b1cbt6/stmicroelectronics?utm_currency=USD&region=nac, Datasheet Link=https://www.st.com/resource/en/datasheet/stm32g0b1cc.pdf, Height=1.6mm, Manufacturer_Part_Number=STM32G0B1CBT6, Mouser Price/Stock=https://www.mouser.co.uk/ProductDetail/STMicroelectronics/STM32G0B1CBT6?qs=CiayqK2gdcKaQJ%2FcS3grXw%3D%3D
IC2 IC3: "Integrated Circuit", Manufacturer_Name="Analog Devices", Mouser Part Number=700-MAX31856MUD+, Arrow Part Number=MAX31856MUD+, Arrow Price/Stock=https://www.arrow.com/en/products/max31856mud/analog-devices?utm_currency=USD&region=nac, Datasheet Link=https://componentsearchengine.com/Datasheets/2/MAX31856MUD+.pdf, Height=1.1mm, Manufacturer_Part_Number=MAX31856MUD+, Mouser Price/Stock=https://www.mouser.co.uk/ProductDetail/Analog-Devices-Maxim-Integrated/MAX31856MUD%2b?qs=sO%2FZ8XQFeM1TlxwAJsKRYw%3D%3D
J1: "Connector", Manufacturer_Name=SAMTEC, Mouser Part Number=200-FTSH10701LDVKTR, Arrow Part Number=FTSH-107-01-L-DV-K-TR, Arrow Price/Stock=https://www.arrow.com/en/products/ftsh-107-01-l-dv-k-tr/samtec?utm_currency=USD&region=nac, Datasheet Link=https://suddendocs.samtec.com/prints/ftsh-1xx-xx-xxx-dv-xxx-xxx-x-xx-mkt.pdf?_gl=1*mdiyn1*_ga*MTcyMTUxMTIwMy4xNzEyMDQxMTc2*_ga_3KFNZC07WW*MTcxMjEzMDIxOS4yLjEuMTcxMjEzMDI1NC4yNS4wLjA., Height=6.25mm, Manufacturer_Part_Number=FTSH-107-01-L-DV-K-TR, Mouser Price/Stock=https://www.mouser.co.uk/ProductDetail/Samtec/FTSH-107-01-L-DV-K-TR?qs=%252BZP6%2F%252BtExtDlh0wyxE013Q%3D%3D
J2 J3: library part CMP-002-00113-1, "Connector Header, PH Series, 3 Position, Side Entry, 2.00mm, Solder, Surface Mount, Natural.", Max Current Rating=2A, Max Operating Temperature=85°C, Min Operating Temperature=-25°C, Voltage Rating=100V, Connector Type="Male Pin", Gender=Male, Mounting Technology="Surface Mount", Pins=3
J4: library part CMP-00257-07672643-1, "43650-0205 Conn Wire to Board HDR 2 POS 3mm Solder RA Side Entry Thru-Hole Micro-Fit 3.0™ Tray", Current Rating=5A, Manufacturer Lifecycle Status=ACTIVE, Voltage Rating=600V, Contact Material=Brass, Contact Plating=Gold, Country of Origin=US, Gender=Male, Glow Wire Compliant=Compliant, Halogen Free="Low Halogen", Housing Material=Thermoplastic, Lifecycle Status=Production, NexarPartId=7672643, Number of Circuits=2, Number Of Contacts=2, Number of Positions=2, Number Of Rows=1, Orientation="Right Angle", Pitch=3mm, Plating=Tin, RoHS=Compliant, Termination="Through Hole"
J5 J6: library part CMP-1684-00017-1, "Female Header, Pitch 5 mm, 1 x 2 Position, Height 10 mm, Tail Length 3.5 mm, Rohs, Bulk", Color=Green, Current=13.5A, Manufacturer="TE Connectivity", Package Description="Female Header, Pitch 5 mm, 1 x 2 Position, Height 10 mm, Tail Length 3.5 mm", Package Reference=THD, Standard Package=300, Voltage=300V, 3D Model=282836-2.pdf, Category=Connectors,Interconnects, Clamp Material - Plating=Brass-NickelPlated, Contact Material - Plating=Brass-TinPlated, Datasheet URL=http://www.te.com.cn/commerce/DocumentDelivery/DDEController?Action=showdoc&DocId=Catalog+Section%7F1308389_EUROSTYLE_TERMINAL_BLOCKS%7F0607%7Fpdf%7FEnglish%7FENG_CS_1308389_EUROSTYLE_TERMINAL_BLOCKS_0607.pdf%7F282836-2, Dynamic Catalog=BuchananSeries, Family=TerminalBlocks-WiretoBoard, Featured Product=EurostyleTerminalBlockConnectors, Features=Interlocking(Side), Housing Material=Polyamide(PA66),Nylon6/6, Manufacturer URL=http://www.te.com, Mating Orientation=HorizontalwithBoard, Mounting Type=ThroughHole, Number of Levels=1, Other Names="5ULV-02B / A98076", Packaging=Bulk, Pitch="0.197\"(5.00mm)", Positions Per Level=2, Product Training Modules=Wire-to-BoardEurostyleTerminalBlocks, RoHS Information=282836-2StatementofCompliance, Screw Material - Plating=Brass-NickelPlated, Screw Thread=M3, Series=Buchanan, Torque - Screw=0.68Nm(6Lb-In), Wire Gauge=16-30AWG, Wire Termination=Screw-RisingCageClamp
L1: library part CMP-006-00028-1, "General Purpose Inductor", RoHS Compliant=Yes
R1 R5 R6 R11 R12 R13 R16: library part CMP-03412-005349-1, "RES SMD 10K OHM 1% 1/10W 0603 / RT0603FRE0710KL", Manufacturer=Yageo, Manufacturer Part Number=RT0603FRE0710KL, Package=RT0603, Power Rating=0.1W, Resistance=10KΩ, Temperature="-55°C to +155°C", Temperature Coefficient="50 ppm/°C", Temperature Range High=+155°C, Temperature Range Low=-55°C, Tolerance=0.01, Voltage Rating=75V, Automotive=No, Category=Res, ComponentLink2Description=Datasheet, ComponentLink2URL=http://www.yageo.com/documents/recent/PYu-RT_1-to-0.01_RoHS_L_9.pdf, Composition="Thin Film", Device Class L1="Passive Components", Device Class L2=Resistors, Device Class L3="Chip SMD Resistors", Digikey Description="RES SMD 10K OHM 1% 1/10W 0603", Footprint Url=http://www.yageo.com/exep/pages/download/literatures/PYu-R_Mount_10.pdf, Height=0.55mm, Ipc Land Pattern Name=RESC16080X45, Lead Free=Yes, Mouser Description="Thin Film Resistors - SMD 10K ohm 1% 1/10W", Octopart=https://octopart.com/rt0603fre0710kl-yageo-40009243, RoHS=TRUE, Series=RT
R2 R3 R10: library part CMP-03412-038529-1, "AF0603JR-07220RL Anti-Sulfurated Chip Resistors Automotive Grade 220Ω 5% 100ppm/°C 0603", Case/Package=0603, Max Operating Temperature=155°C, Max Power Dissipation=100mW, Min Operating Temperature=-55°C, Resistance=220R, Resistor Type="Thick Film", Temperature Coefficient=100ppm/°C, Tolerance=5%, Features="Moisture Resistant", Height=0.022inch, Lead Free="Lead Free", Length=0.063inch, Number of Terminations=2, Packaging="Tape and Reel", RoHS Compliant=Yes, Series=AF, Width=0.031inch
R4: library part CMP-03412-030646-1, "RT0603 100Ω 0.1W 50 ppm/°C 1.00% RT0603FRE07100RL", Manufacturer=Yageo, Manufacturer Part Number=RT0603FRE10100RL, Package=RT0603, Power Rating=0.1W, Resistance=100Ω, Temperature="-55°C to +155°C", Temperature Coefficient="50 ppm/°C", Temperature Range High=+155°C, Temperature Range Low=-55°C, Tolerance=0.01, Voltage Rating=75V, Automotive=No, Category=Res, ComponentLink2Description=Datasheet, ComponentLink2URL=http://www.yageo.com/documents/recent/PYu-RT_1-to-0.01_RoHS_L_9.pdf, Composition="Thin Film", Device Class L1="Passive Components", Device Class L2=Resistors, Device Class L3="Chip SMD Resistors", Footprint Url=http://www.yageo.com/exep/pages/download/literatures/PYu-R_Mount_10.pdf, Height=0.55mm, Ipc Land Pattern Name=RESC16080X45, Lead Free=Yes, Octopart=https://octopart.com/rt0603fre10100rl-yageo-22252409, RoHS=TRUE, Series=RT
R7: library part CMP-03412-039700-1, "Anti-Sulfurated Chip Resistors Automotive Grade 120Ω 1% 100ppm/°C 0603 AF0603FR-07120RL", Case/Package=0603, Max Operating Temperature=155°C, Max Power Dissipation=100mW, Min Operating Temperature=-55°C, Resistance=120R, Resistor Type="Thick Film", Temperature Coefficient=100ppm/°C, Tolerance=1%, Features="Moisture Resistant", Height=0.022inch, Length=0.063inch, Number of Terminations=2, Packaging="Tape and Reel", RoHS Compliant=Yes, Series=AF, Width=0.031inch
R8: library part CMP-009-00192-1, "Fixed Resistor, Metal Glaze/thick Film, 0.25W, 100000ohm, 200V, 1% +/-Tol, 100ppm/Cel, Surface Mount, 1206", Resistor Type="FIXED RESISTOR", Pins=2, Reach SVHC Compliant=Yes, RoHS Compliant=Yes
R9: library part CMP-009-00195-1, "Fixed Resistor, Thin Film, 0.125W, 18700ohm, 100V, 0.1% +/-Tol, 25ppm/Cel, Surface Mount, 0805", Case/Package=0805, Max Operating Temperature=155°C, Min Operating Temperature=-55°C, Package Height=0.5mm, Package Length=2mm, Package Width=1.25mm, Power=125mW, Rated Temperature=85°C, Resistor Type="FIXED RESISTOR", Temperature Coefficient (ppm/Cel)=25, Tolerance=0.1%, Working Voltage=100V, Construction=Rectangular, JESD-609 Code=e3, Mounting Technology="Surface Mount", Packaging="Tape and Reel", Pins=2, Reach SVHC Compliant=Yes, Reference Standard=AEC-Q200, RoHS Compliant=Yes, Technology="THIN FILM", Terminal Finish=Nickel, Termination=Wraparound
R14 R15 R17 R18: library part CMP-07231-000376-1, "AEC-Q200 Compliant Chip Resistors 0603 100Ω 0.1W 1% 100ppm/°C"
U1: "Integrated Circuit", Manufacturer_Name="Texas Instruments", Mouser Part Number=595-TCAN3414DR, Arrow Part Number=TCAN3414DR, Arrow Price/Stock=https://www.arrow.com/en/products/tcan3414dr/texas-instruments?region=nac, Datasheet Link=https://www.ti.com/lit/ds/symlink/tcan3414.pdf?ts=1713723144569&ref_url=https%253A%252F%252Fwww.mouser.ch%252F, Height=1.75mm, Manufacturer_Part_Number=TCAN3414DR, Mouser Price/Stock=https://www.mouser.co.uk/ProductDetail/Texas-Instruments/TCAN3414DR?qs=mELouGlnn3egF2AojRJddw%3D%3D
U2: library part CMP-019-00059-1, "SIMPLE SWITCHER® 4.5-V to 65-V, 1-A synchronous buck converter with 25-µA IQ 6-SOT-23 -40 to 150", Case/Package=SOT-23, Frequency=400Hz, Max Supply Voltage=65V, Min Supply Voltage=4.5V, Output Current=1A, Pins=6
U3: library part CMP-12153-000011-1, "IC REG LINEAR 3.3V 2A 6DFN", Case/Package=DFN, Dropout Voltage=130mV, Max Input Voltage=6V, Max Operating Temperature=125°C, Min Input Voltage=1.25V, Min Operating Temperature=-40°C, Operating Supply Current=1mA, Output Current=2A, Output Voltage=3.3V, Package Quantity=3000, Lead Free="Lead Free", Mount="Surface Mount", Number Of Outputs=1, Number of Regulators=1, Output Type=Fixed, Packaging="Tape and Reel"
U4: library part CMP-00370-103943066-1, "TMP461AIRUNR-S Temperature Sensor Digital, Local/Remote -40°C ~ 125°C 11 b 10-WQFN (2x2)", Manufacturer Lifecycle Status=ACTIVE, Height=0m, Length=2mm, Lifecycle Status=Production, NexarPartId=103943066, Number of Pins=10, Schedule B="8542390000, 8542390000", Thickness=750µm, Width=2mm
Y1: library part CMP-27762-007472-1, "Crystal 50MHz ±10ppm 4pF SMD-4 2.5mm x 2mm", Case/Package=SMD/SMT, ESR (Equivalent Series Resistance)=70R, Frequency=50MHz, Frequency Stability=10ppm, Load Capacitance=4pF, Max Operating Temperature=70°C, Min Operating Temperature=-20°C, Frequency Tolerance=10ppm, Mount="Surface Mount", Packaging="Tape and Reel", RoHS Compliant=Yes

## Free pads (board coordinates)
  round 5.08 hole 3.2: 2(5,5) 2(5,60) 2(60,5) 2(60,60)

## Via types
v1: diameter 0.61, hole 0.305, Top Layer 1 to Bottom Layer 1, tented both sides, 276 vias

## Nets (pads, with @x,y where several pads share a name; then routed paths per layer and width w, separated by ;. In a path a pad name is that pad's centre, name@x,y a point inside that pad or via, vN(x,y) a via of type N, cw(c..) or ccw(c..) an arc to the next point about the centre after c; other vN are vias at no path point)
3V3: C3.1 C4.1 C5.1 C6.1 C8.1 C16.1 C17.1 C20.1 C22.1 C25.1 C27.1 D4.2 IC1.4 IC1.5 IC1.6 IC2.5 IC2.8 IC3.5 IC3.8 J1.3 R11.1 R12.2 R13.1 R16.1 U1.3 U3.1 U3.2 U4.1 | length 35.8
  Top Layer 1 w0.254: v1(8.404,35.04) J1.3 ; v1(21.4,44.408) 23.031,44.408 C20.1 23.05,45.408 23.199,45.557 26.178,45.557 26.326,45.408 26.326,44.462 IC2.5 ; R13.1@22.65,35.671 22.632,35.689 22.632,37.077 v1(22.7,37.145) 22.7,37.241 23.05,37.591 C22.1 25.039,38.573 IC2.8 ; v1(29.802,18.645) 29.815,18.645 29.84,18.62 29.865,18.645 31.225,18.645 D4.2 ; R16.1 33.161,37.667 34.003,38.509 34.335,38.509 v1(34.4,38.573) C25.1 36.011,38.562 IC3.8 ; C27.1 v1(36,44.5) 36,45.406 36.15,45.557 39.201,45.557 39.35,45.408 IC3.5 ; R11.1 38.577,18.193 R11.1@38.779,17.991 ; U4.1 49.152,34.6 C17.1 v1(51.3,34.502)
  Top Layer 1 w0.5: v1(39.25,24.846) 39.286,24.846 39.753,24.379 40.594,24.379 C8.1 40.608,24.365 U1.3
  other v1: 13.7,16.6 39.511,17.081 13.062,17.9 14.4,17.9 18.037,26.475
5V0: C12.1 C13.1 C14.1 C15.1 L1.2 R8.1 U3.5 U3.6 | length 21.9
  Top Layer 1 w0.152: C12.1 C12.1@11.876,4.626
  Top Layer 1 w0.254: C12.1@11.225,5.035 11.755,4.505 11.755,4.444 12.35,3.849 12.411,3.849 14.16,2.1 30.874,2.1 31.273,2.499 R8.1
CANH: J2.2 J3.2 R7.2 U1.7 | length 28.9
  Top Layer 1 w0.254: U1.7 53.133,25.635 R7.2 53.962,25.677 54.54,26.255 54.54,31.421 55.119,32 J2.2 55.5,32 54.325,33.175 54.325,41.825 55.5,43 J3.2
CANL: J2.3 J3.3 R7.1 U1.6 | length 29.4
  Top Layer 1 w0.254: U1.6 53.133,24.365 R7.1 55.323,24.323 57.5,26.5 57.5,29.627 J2.3@57.127,30 ; J3.3 57.123,40.627 58.373,40.627 58.373,40.578 59.668,39.283 59.668,31.668 58,30 J2.3@57.127,30 ; J2.3@57.127,30 J2.3 J2.3@57.127,30
FB: R8.2 R9.1 U2.3 | length 7.1
  Top Layer 1 w0.25: R8.2@31.751,5.25 33.25,5.25 ; 33.25,7.251 33.25,5.25 ; R9.1 33.25,5.25
  Top Layer 1 w0.254: 33.25,7.251 33.299,7.3 U2.3
  Top Layer 1 w0.4: R8.2 R8.2@31.751,5.25
GND: C1.2 C2.2 C3.2 C4.2 C5.2 C6.2 C7.2 C8.2 C10.2 C11.2 C12.2 C13.2 C14.2 C15.2 C16.2 C17.2 C18.1 C20.2 C21.2 C22.2 C23.1 C25.2 C26.2 C27.2 D3.2 IC1.7 IC2.1 IC2.14 IC3.1 IC3.14 J1.5 J1.7 J2.1 J2.4 J2.5 J3.1 J3.4 J3.5 J4.2 J4.3 J4.4 R1.2 R2.1 R3.1 R4.1 R5.2 R6.2 R9.2 R10.1 U1.2 U2.2 U3.3 U3.7 U4.5 U4.6 U4.10 Y1.2 Y1.4 | length 9.6
  Top Layer 1 w0.254: v1(21.388,39.539) 21.876,40.027 C22.2 ; Y1.2 24.635,23.113 25.537,24.015 25.537,24.264 Y1.4 ; v1(30.484,48.396) 30.484,48.299 30.81,47.974 C18.1 ; 32.5,8.25 U2.2
  Top Layer 1 w0.508: C8.2 40.604,25.631 42.534,25.631 U1.2
  other v1: 8.5,3.5 29.5,3.5 38.5,3.5 41.5,3.5 44.5,3.5 47.5,3.5 50.5,3.5 53.5,3.5 56.5,3.5 28,6.5 46,6.5 49,6.5 52,6.5 55,6.5 64,6.5 5.5,9.5 8.5,9.5 29.5,9.5 35.5,9.5 47.5,9.5 50.5,9.5 53.5,9.5 62.5,9.5 7,12.5 28,12.5 31,12.5 34,12.5 37,12.5 64,12.5 5.5,15.5 8.5,15.5 17.5,15.5 20.5,15.5 23.5,15.5 26.5,15.5 29.5,15.5 35.5,15.5 38.5,15.5 41.5,15.5 44.5,15.5 59.5,15.5 62.5,15.5 7,18.5 10,18.5 16,18.5 28,18.5 37,18.5 43,18.5 46,18.5 64,18.5 5.5,21.5 8.5,21.5 11.5,21.5 20.5,21.5 23.5,21.5 44.5,21.5 47.5,21.5 50.5,21.5 53.5,21.5 56.5,21.5 59.5,21.5 62.5,21.5 7,24.5 10,24.5 13,24.5 16,24.5 31,24.5 34,24.5 46,24.5 58,24.5 61,24.5 64,24.5 5.5,27.5 11.5,27.5 44.5,27.5 53.5,27.5 56.5,27.5 59.5,27.5 13,30.5 43,30.5 49,30.5 52,30.5 61,30.5 64,30.5 5.5,33.5 8.5,33.5 50.5,33.5 53.5,33.5 62.5,33.5 7,36.5 13,36.5 46,36.5 49,36.5 52,36.5 58,36.5 43.091,37.575 5.5,39.5 8.5,39.5 11.5,39.5 14.5,39.5 17.5,39.5 32.5,39.5 44.5,39.5 47.5,39.5 50.5,39.5 53.5,39.5 56.5,39.5 7,42.5 10,42.5 13,42.5 16,42.5 19,42.5 22,42.5 31,42.5 34,42.5 37,42.5 43,42.5 46,42.5 49,42.5 52,42.5 61,42.5 64,42.5 5.5,45.5 8.5,45.5 11.5,45.5 14.5,45.5 17.5,45.5 20.5,45.5 32.5,45.5 47.5,45.5 50.5,45.5 53.5,45.5 59.5,45.5 62.5,45.5 7,48.5 10,48.5 13,48.5 16,48.5 19,48.5 22,48.5 25,48.5 34,48.5 37,48.5 43,48.5 46,48.5 49,48.5 52,48.5 55,48.5 58,48.5 5.5,51.5 8.5,51.5 11.5,51.5 14.5,51.5 17.5,51.5 20.5,51.5 23.5,51.5 29.5,51.5 32.5,51.5 35.5,51.5 44.5,51.5 47.5,51.5 50.5,51.5 53.5,51.5 56.5,51.5 59.5,51.5 62.5,51.5 7,54.5 10,54.5 13,54.5 16,54.5 19,54.5 22,54.5 25,54.5 31,54.5 34,54.5 37,54.5 40,54.5 43,54.5 46,54.5 49,54.5 52,54.5 55,54.5 58,54.5 61,54.5 64,54.5 8.5,57.5 11.5,57.5 14.5,57.5 17.5,57.5 20.5,57.5 26.5,57.5 32.5,57.5 35.5,57.5 41.5,57.5 44.5,57.5 47.5,57.5 50.5,57.5 53.5,57.5 56.5,57.5 62.5,57.5 10,60.5 13,60.5 16,60.5 19,60.5 22,60.5 25,60.5 28,60.5 31,60.5 34,60.5 37,60.5 40,60.5 43,60.5 46,60.5 49,60.5 52,60.5 55,60.5 64,60.5 5.5,63.5 8.5,63.5 11.5,63.5 14.5,63.5 17.5,63.5 20.5,63.5 23.5,63.5 26.5,63.5 29.5,63.5 32.5,63.5 35.5,63.5 38.5,63.5 41.5,63.5 44.5,63.5 47.5,63.5 50.5,63.5 53.5,63.5 56.5,63.5 59.5,63.5
LEDG: D1.2 IC1.19 | length 2.2
  Top Layer 1 w0.254: D1.2 32.5,18.645 32.75,18.895 IC1.19
LEDY: D2.2 IC1.20 | length 2.3
  Top Layer 1 w0.254: IC1.20 33.25,19.12 D2.2
NetC9_1: C9.1 L1.1 U2.6 | length 13.5
  Top Layer 1 w0.25: L1.1 25.95,9.65 27.275,10.975 C9.1 35.725,10.975 36.825,9.875 U2.6
NetC9_2: C9.2 U2.1 | length 2.3
  Top Layer 1 w0.25: C9.2 32.325,9.2 U2.1
NetD1_1: D1.1 R2.2 | length 1.7
  Top Layer 1 w0.254: R2.2 D1.1
NetD2_1: D2.1 R3.2 | length 2
  Top Layer 1 w0.254: D2.1 34.5,16.27 R3.2
NetD4_1: D4.1 R10.2 | length 2
  Top Layer 1 w0.254: R10.2 30.5,16.27 D4.1
NetIC1_33: IC1.33 U1.4 | length 8
  Top Layer 1 w0.152: IC1.33 37.75,26.25 38.5,25.5 38.5,24 39.25,23.25 42.383,23.25 U1.4
NetIC1_34: IC1.34 U1.1 | length 5.6
  Top Layer 1 w0.152: IC1.34@37,26.75 42.383,26.75 U1.1
NetJ1_11: J1.11 R4.2 | length 3.3
  Top Layer 1 w0.254: R4.2 7.86,29.96 J1.11
NetR5_1: R5.1 U1.8 | length 2.4
  Top Layer 1 w0.254: U1.8 50.228,26.905 R5.1
NetR6_1: R6.1 U1.5 | length 2.4
  Top Layer 1 w0.254: U1.5 50.228,23.095 R6.1
NetU4_2: U4.2 U4.3 | length 0.5
  Top Layer 1 w0.254: U4.3 U4.2
NRST: C7.1 IC1.10 J1.12 | length 29.8
  Top Layer 1 w0.152: IC1.10 31.35,23.25 v1(31.85,23.75)
  Top Layer 1 w0.254: J1.12 15.227,29.768 16.638,29.768 16.9,29.506 16.9,25.025 17.598,24.327 v1(18.596,24.327) C7.1
  Bottom Layer 1 w0.254: v1(18.596,24.327) 20.069,25.8 31.189,25.8 31.85,25.139 v1(31.85,23.75)
SCL: IC1.25 R11.2 U4.9 | length 20.8
  Top Layer 1 w0.254: IC1.25 37.75,22.25 v1(38.5,21.5) R11.2 ; U4.9 47,32 47.5,31.5 v1(47.5,30.25)
  Bottom Layer 1 w0.254: v1(38.5,21.5) 41,21.5 47.5,28 v1(47.5,30.25)
SDA: IC1.26 R12.1 U4.8 | length 21
  Top Layer 1 w0.254: IC1.26 v1(38.5,22.75) 40.5,20.75 R12.1 ; v1(46.5,31) U4.8
  Bottom Layer 1 w0.254: v1(38.5,22.75) 41.42,22.75 46.5,27.83 v1(46.5,31)
SPI1_MISO: IC1.43 IC2.11 IC3.11 | length 46.1
  Top Layer 1 w0.254: IC2.11 27,39.9 ; IC1.43 32.25,33.45 31.6,34.1 22.125,34.1 20.612,35.613 20.612,40.296 21.315,41 25.9,41 27,39.9 ; IC3.11 40,40.506 39.106,41.4 28.05,41.4 27,40.35 27,39.9
SPI1_MOSI: IC1.44 IC2.12 IC3.12 | length 25.9
  Top Layer 1 w0.254: IC2.12 27.65,37.45 v1(28.1,37) ; v1(31,33.3) 31.05,33.3 31.75,32.6 IC1.44 ; v1(40.65,37) IC3.12
  Bottom Layer 1 w0.254: v1(31,33.3) 30.904,33.3 30.754,33.45 29.55,33.45 28.1,34.9 v1(28.1,37) v1(40.65,37)
SPI1_SCK: IC1.42 IC2.10 IC3.10 | length 30.4
  Top Layer 1 w0.254: IC2.10 26.35,36.45 27.2,35.6 38.3,35.6 39.35,36.65 ; IC1.42 32.75,33.45 33.4,34.1 37.575,34.1 39.35,35.875 39.35,36.65 ; IC3.10 39.35,36.65
SpI_CS_T1: IC1.46 IC2.9 R13.2 | length 13.3
  Top Layer 1 w0.254: R13.2 23.895,35.688 25.7,37.493 ; IC2.9@25.7,37.844 25.7,37.493 ; v1(27,34.9) 25.7,36.2 25.7,37.493 ; v1(28.5,33.3) 30.75,31.05 IC1.46
  Bottom Layer 1 w0.254: v1(27,34.9) 27,34.85 28.5,33.35 v1(28.5,33.3)
SPI_CS_T2: IC1.45 IC3.9 R16.2 | length 17.6
  Top Layer 1 w0.254: v1(30.25,32.6) 31.25,31.6 IC1.45 ; R16.2 35.465,36.86 v1(36.032,36.292) 38.342,36.292 38.7,36.65 IC3.9
  Bottom Layer 1 w0.254: v1(30.25,32.6) 32.34,32.6 v1(36.032,36.292)
SWCLK: IC1.36 J1.6 R1.1 | length 35
  Top Layer 1 w0.152: IC1.36 38.05,27.75 38.723,28.423 R1.1
  Top Layer 1 w0.254: J1.6 15.278,33.527 16.373,33.527 17.003,32.897 17.093,32.807 17.723,33.437 18.262,32.898 17.182,31.818 17.721,31.279 18.801,32.359 19.34,31.82 18.26,30.74 18.798,30.201 19.249,30.652 19.662,30.238 19.709,30.191 v1(23.115,30.191) ; v1(36.5,30.2) 38.223,30.2 38.723,29.699 R1.1
  Bottom Layer 1 w0.254: v1(23.115,30.191) 23.12,30.196 36.496,30.196 v1(36.5,30.2)
SWDIO: IC1.35 J1.4 | length 35.2
  Top Layer 1 w0.152: IC1.35 40.75,27.25 41,27.5 v1(41,30.5)
  Top Layer 1 w0.254: J1.4 18.223,35.04 22.197,31.067 v1(24.5,31.067)
  Bottom Layer 1 w0.254: v1(24.5,31.067) 24.566,31 40.5,31 v1(41,30.5)
T1+: C19.2 C21.1 IC2.4 R15.1 | length 6.1
  Top Layer 1 w0.254: C21.1 C19.2 ; R15.1 26.35,48.396 26.35,46.708 C19.2 ; IC2.4 27,46.081 26.581,46.5 C19.2
T1-: C18.2 C19.1 IC2.3 R14.1 | length 6
  Top Layer 1 w0.254: IC2.3 27.65,46.162 27.988,46.5 C19.1 ; R14.1 28.262,48.438 28.262,46.75 C19.1 ; C18.2 C19.1
T1_DRDY: IC1.40 IC2.7 | length 23.5
  Top Layer 1 w0.254: IC2.7 25.08,44.408 25.08,42.524 v1(25.11,42.494) ; IC1.40 33.75,31.654 34,31.904 v1(34,32)
  Bottom Layer 1 w0.254: v1(25.11,42.494) 24.5,41.884 24.5,35.025 27.775,31.75 33.673,31.75 33.923,32 v1(34,32)
T1_FAULT: IC1.47 IC2.13 | length 32.6
  Top Layer 1 w0.254: IC2.13 v1(28.3,40.35) ; v1(28.3,42.494) 27.481,41.675 21.097,41.675 19.645,40.223 19.645,35.113 22.258,32.5 28.5,32.5 30.25,30.75 IC1.47
  Bottom Layer 1 w0.254: v1(28.3,40.35) v1(28.3,42.494)
T1_TERM_N: IC2.2 J5.1 R14.2 | length 18.9
  Top Layer 1 w0.254: IC2.2 28.3,45.495 28.449,45.644 31.445,45.644 31.594,45.793 31.594,48.955 30.484,50.065 28.72,50.065 28.491,50.294 28.491,55.491 28.5,55.5 28.5,56.5 J5.1
T1_TERM_P: J5.2 R15.2 | length 7.8
  Top Layer 1 w0.254: J5.2 26.079,55.921 R15.2
T2+: C24.2 C26.1 IC3.4 R18.1 | length 6.3
  Top Layer 1 w0.254: C26.1 C24.2@39.438,46.5 ; R18.1 38.957,48.548 39.211,48.294 39.211,48.079 39.218,48.072 39.218,46.721 C24.2@39.438,46.5 ; IC3.4 40,46.084 39.584,46.5 C24.2 C24.2@39.438,46.5
T2-: C23.2 C24.1 IC3.3 R17.1 | length 6.2
  Top Layer 1 w0.254: IC3.3 40.65,46.159 40.991,46.5 C24.1 ; R17.1 41.3,48.479 41.3,46.793 41.011,46.504 C24.1 ; C23.2 C24.1
T2_DRDY: IC1.41 IC3.7 | length 28.4
  Top Layer 1 w0.254: IC1.41 33.25,32.854 33.696,33.3 42.3,33.3 44.5,35.5 44.5,38.45 40.95,42 39.584,42 38.095,43.49 38.095,44.393 IC3.7
T2_FAULT: IC1.48 IC3.13 | length 28.2
  Top Layer 1 w0.254: IC1.48 29.75,27.835 v1(30.75,26.835) ; IC3.13 41.3,37.3 v1(43.1,35.5)
  Bottom Layer 1 w0.254: v1(30.75,26.835) 42.535,26.835 44.2,28.5 44.2,34.4 v1(43.1,35.5)
T2_TERM_N: IC3.2 J6.1 R17.2 | length 18.9
  Top Layer 1 w0.254: IC3.2 41.3,45.495 41.449,45.644 44.544,45.644 45,46.1 45,47.5 42.232,50.268 41.553,50.268 R17.2 41.494,55.994 J6.1
T2_TERM_P: J6.2 R18.2 | length 7.6
  Top Layer 1 w0.254: J6.2 39.082,56.418 R18.2
VCP_RX: IC1.12 J1.13 | length 25.5
  Top Layer 1 w0.152: 28.262,20.937 IC1.12
  Top Layer 1 w0.254: J1.13 11.99,28.69 12.233,28.447 12.233,23.767 16.225,19.775 27.1,19.775 28.262,20.937
VCP_TX: IC1.11 J1.14 | length 25.3
  Top Layer 1 w0.254: J1.14 15.035,23.465 v1(17.75,20.75) ; v1(19.75,18.75) 27.031,18.75 28.852,20.571 28.852,21.336 29.487,21.971 29.487,22.513 29.25,22.75 IC1.11
  Bottom Layer 1 w0.254: v1(17.75,20.75) v1(19.75,18.75)
Vin: C10.1 C11.1 D3.1 J4.1 U2.4 U2.5
XTAL2A: C1.1 IC1.8 Y1.1 | length 7
  Top Layer 1 w0.152: C1.1 24.549,24.476 Y1.1 24.635,24.737 25.398,25.5 26.449,25.5 26.872,25.077 26.872,24.476 27.083,24.265 28.247,24.265 IC1.8
XTAL2B: C2.1 IC1.9 Y1.3 | length 4.7
  Top Layer 1 w0.152: C2.1 25.961,22.812 Y1.3 25.835,23.098 25.919,23.182 26.184,23.447 26.686,23.447 26.699,23.459 27.138,23.459 27.392,23.714 28.226,23.714 28.245,23.733 IC1.9
pads on no net: IC1.1 IC1.2 IC1.3 IC1.13 IC1.14 IC1.15 IC1.16 IC1.17 IC1.18 IC1.21 IC1.22 IC1.23 IC1.24 IC1.27 IC1.28 IC1.29 IC1.30 IC1.31 IC1.32 IC1.37 IC1.38 IC1.39 IC2.6 IC3.6 J1.1 J1.2 J1.8 J1.9 J1.10 U3.4 U4.4 U4.7

## Polygon pours and split planes (outlines as drawn)
GND on Top Layer 1 "GND_L01_P010" (solid, pour order 10): 0,65 0,0 65,0 65,65
Vin on Top Layer 1 "VIN_L01_P009" (solid, pour order 9): 57,18.5 56.97,18.47 49,18.47 49,13.5 38,13.5 38,8.524 36.5,8.524 36.5,6.25 37.5,6.25 37.5,4.5 41,4.5 41,11 53.5,11 53.5,15.169 57,15.169
3V3 on Top Layer 1 "3V3_L01_P005" (solid, pour order 5): 27.53,25.098 27.544,25.113 29.007,25.113 29.007,26.374 28.982,26.4 27.138,26.4 26.268,27.27 17.72,27.27 17.3,26.85 17.3,26.1 17.825,25.575 23.712,25.575 23.937,25.8 26.465,25.8
5V0 on Top Layer 1 "5V0_L01_P007" (solid, pour order 7): 17.5,11.45 17.45,11.5 13.768,11.5 12.253,13.015 12.237,12.999 10.876,12.999 10.876,12.311 11.641,11.546 11.641,8.592 11.197,8.149 11.243,8.103 11.243,5.486 11.017,5.261 11.017,3.731 13.487,3.731 13.51,3.708 14.611,4.809 14.611,6.056 17.486,6.056
3V3 on Top Layer 1 "3V3_L01_P006" (solid, pour order 6): 38.086,18.514 38.086,17.534 39.195,16.425 40.025,16.425 40.914,17.314 40.914,18.521
3V3 on Top Layer 1 "3V3_L01_P001" (solid, pour order 1): 10.875,15.43 15.25,15.43 15.25,18.75 10.875,18.75
GND on Bottom Layer 1 "GND_L04_P011" (solid, pour order 11): 0,65 0,0 65,0 65,65